# EAGLE board Micro_SD_Block-Panel-v10 (EAGLE 6.6.0), part 1 of 3
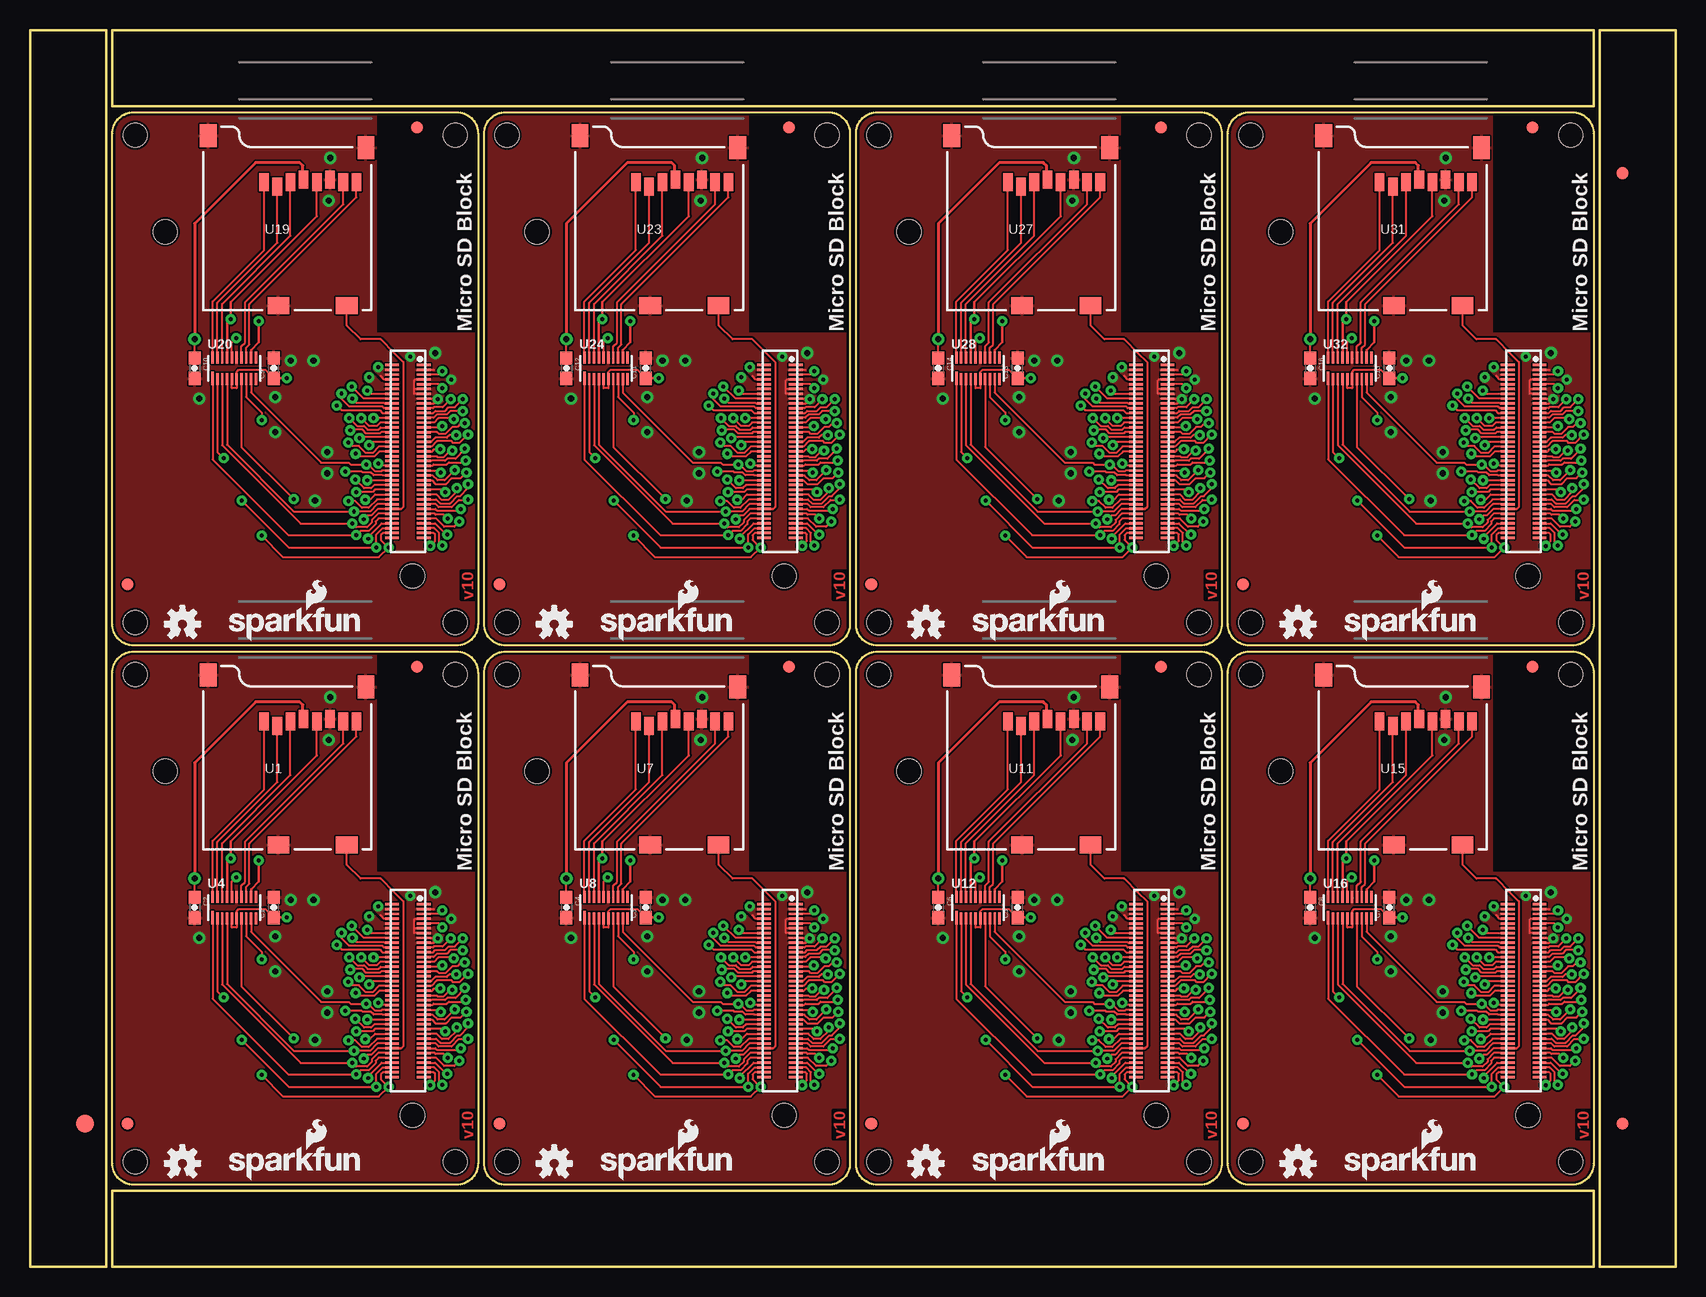
[diagram p0: board, top side]
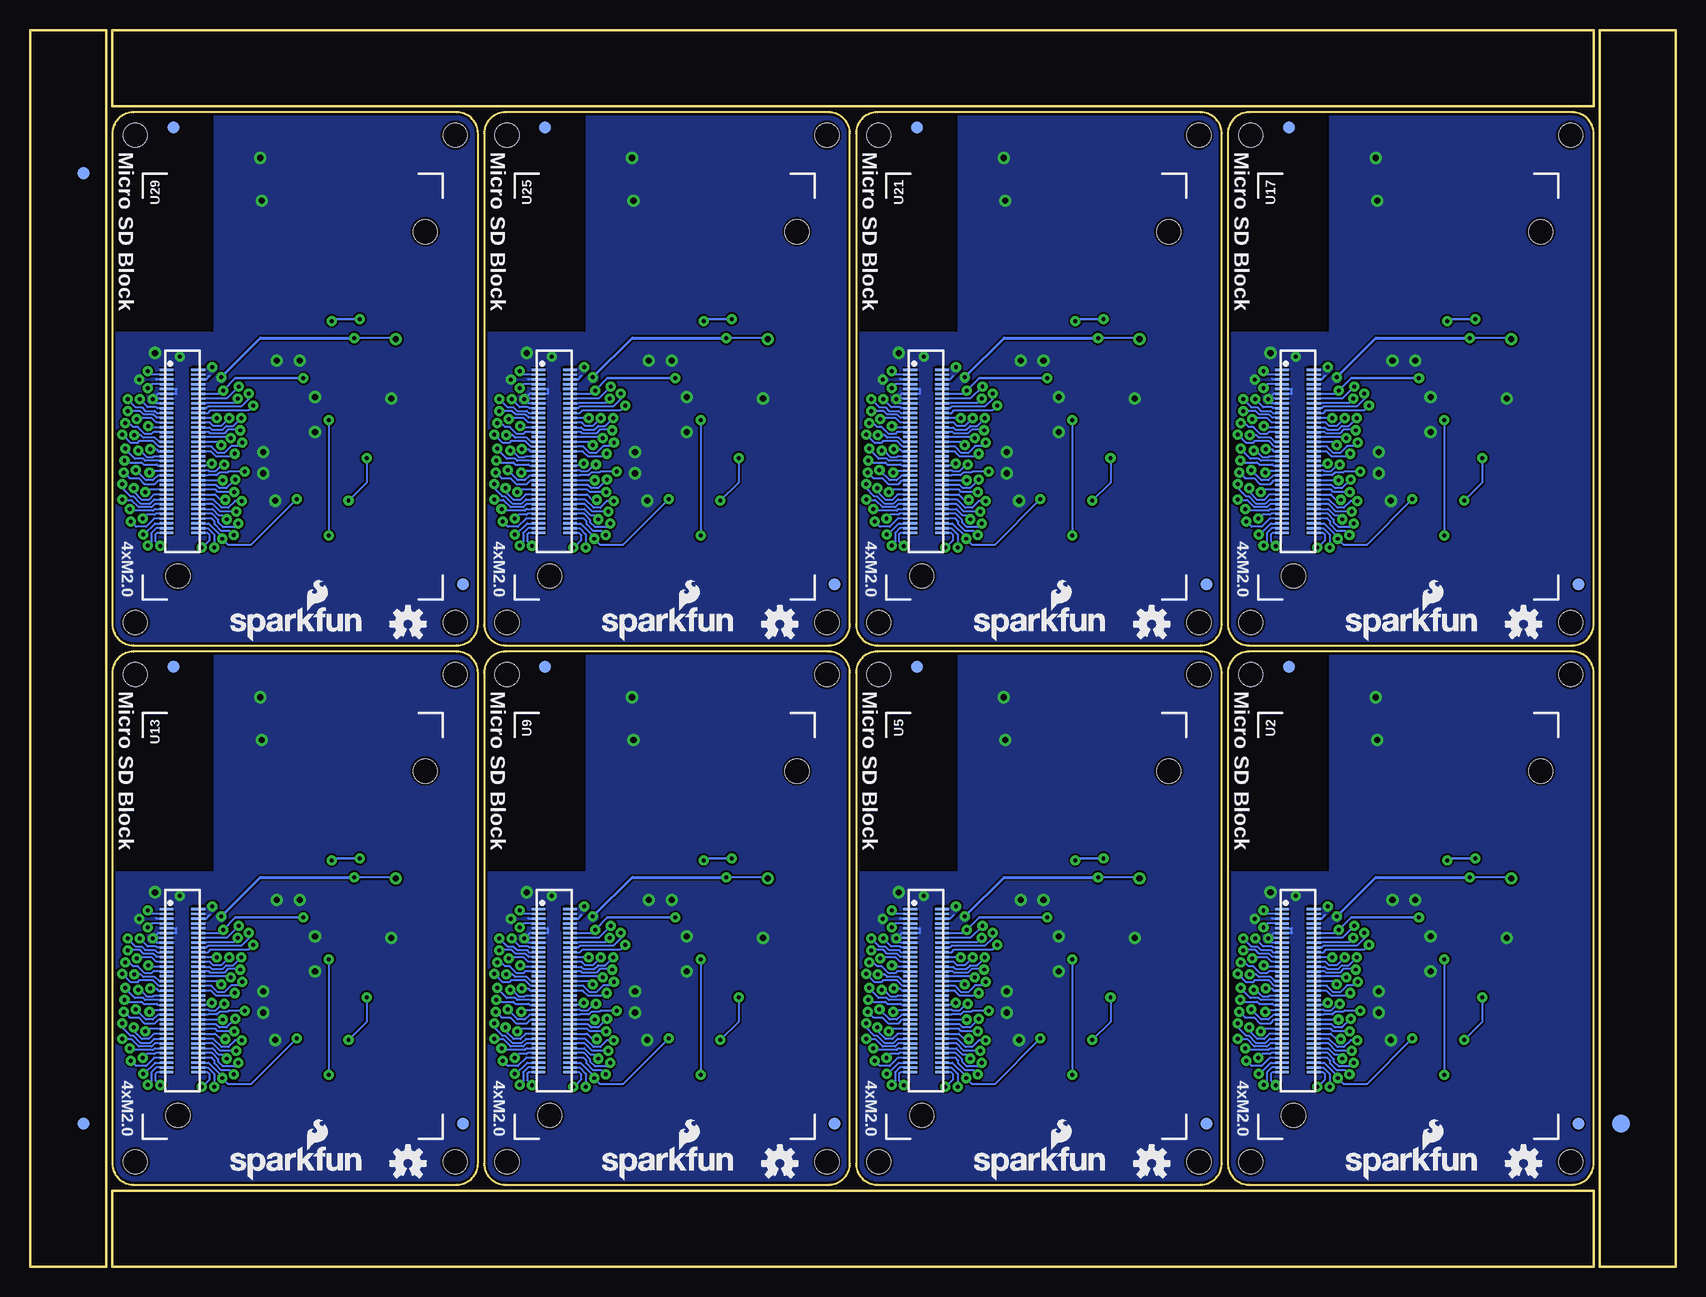
[diagram p1: board, bottom side, seen from below]

Size 137.16 x 103.12 mm. Coordinates in mm from the lower left corner, seen from the top.
Outline: 6.35,79.25 6.35,0 0,0 0,29.72
Outline: 137.16,79.25 137.16,0 130.81,0 130.81,29.72
Outline: 130.81,23.88 130.81,103.12 137.16,103.12 137.16,73.41
Outline: 0,23.88 0,103.12 6.35,103.12 6.35,73.41
Outline: 37.34,49.53 37.34,8.64 arc-90 35.56,6.86 8.64,6.86 arc-90 6.86,8.64 6.86,49.53 arc-90 8.64,51.31 35.56,51.31 arc-90 37.34,49.53
Outline: 68.33,49.53 68.33,8.64 arc-90 66.55,6.86 39.62,6.86 arc-90 37.85,8.64 37.85,49.53 arc-90 39.62,51.31 66.55,51.31 arc-90 68.33,49.53
Outline: 99.31,49.53 99.31,8.64 arc-90 97.54,6.86 70.61,6.86 arc-90 68.83,8.64 68.83,49.53 arc-90 70.61,51.31 97.54,51.31 arc-90 99.31,49.53
Outline: 130.3,49.53 130.3,8.64 arc-90 128.52,6.86 101.6,6.86 arc-90 99.82,8.64 99.82,49.53 arc-90 101.6,51.31 128.52,51.31 arc-90 130.3,49.53
Outline: 37.34,94.49 37.34,53.59 arc-90 35.56,51.82 8.64,51.82 arc-90 6.86,53.59 6.86,94.49 arc-90 8.64,96.27 35.56,96.27 arc-90 37.34,94.49
Outline: 68.33,94.49 68.33,53.59 arc-90 66.55,51.82 39.62,51.82 arc-90 37.85,53.59 37.85,94.49 arc-90 39.62,96.27 66.55,96.27 arc-90 68.33,94.49
Outline: 99.31,94.49 99.31,53.59 arc-90 97.54,51.82 70.61,51.82 arc-90 68.83,53.59 68.83,94.49 arc-90 70.61,96.27 97.54,96.27 arc-90 99.31,94.49
Outline: 130.3,94.49 130.3,53.59 arc-90 128.52,51.82 101.6,51.82 arc-90 99.82,53.59 99.82,94.49 arc-90 101.6,96.27 128.52,96.27 arc-90 130.3,94.49
Outline: 6.86,0 130.3,0 130.3,6.35 6.86,6.35 6.86,0
Outline: 130.3,103.12 6.86,103.12 6.86,96.77 130.3,96.77 130.3,103.12
Copper layers (1*16): Top 0.035mm / dielectric 1.5mm / Bottom 0.035mm
Design rules "SparkFun-2-layer *": minimum track width 6mil, minimum drill 13mil, track to track 6mil, track to pad 6mil, pad to pad 6mil, via to via 6mil, smd to smd 6mil, copper to edge 8mil, drill to drill 8mil, minimum pad ring 12mil, minimum via ring 10mil, stop-mask expansion 4mil, vias tented up to drill 20mil, thermal gap 6mil
Holes 2 mm at 35.43,8.76 8.76,8.76 8.76,49.4 35.43,49.4 66.42,8.76 39.75,8.76 39.75,49.4 66.42,49.4 97.41,8.76 70.74,8.76 70.74,49.4 97.41,49.4 128.4,8.76 101.73,8.76 101.73,49.4 128.4,49.4 35.43,53.72 8.76,53.72 8.76,94.36 35.43,94.36 66.42,53.72 39.75,53.72 39.75,94.36 66.42,94.36 97.41,53.72 70.74,53.72 70.74,94.36 97.41,94.36 128.4,53.72 101.73,53.72 101.73,94.36 128.4,94.36
tRestrict: area 29,33 to 37.3,51.3; area 59.9,33 to 68.3,51.3; area 90.9,33 to 99.3,51.3; area 121.9,33 to 130.3,51.3; area 29,78 to 37.3,96.3; area 59.9,78 to 68.3,96.3; area 90.9,78 to 99.3,96.3; area 121.9,78 to 130.3,96.3
bRestrict: area 29,33 to 37.3,51.3; area 59.9,33 to 68.3,51.3; area 90.9,33 to 99.3,51.3; area 121.9,33 to 130.3,51.3; area 29,78 to 37.3,96.3; area 59.9,78 to 68.3,96.3; area 90.9,78 to 99.3,96.3; area 121.9,78 to 130.3,96.3; 8 lines

## Footprints (pad centres in the part's own frame; a part is rotated, then mirrored left to right if it is on the bottom)
0603-CAP = smd 1.1 x 1: 1 -0.85,0; 2 0.85,0
FIDUCIAL-1.5X3 = smd 1.5 x 1.5: 1 0,0
FIDUCIAL-1X2 = smd 1 x 1: 1 0,0
MICRO-SD-SOCKET-PP = smd 0.8 x 1.5: 1 -8.94,10.7; 2 -7.84,10.3; 3 -6.74,10.7; 4 -5.64,10.9; 5 -4.54,10.7; 6 -3.44,10.9; 7 -2.34,10.7; 8 -1.24,10.7 | smd 1.8 x 1.4: CD1 -2.05,0.4; CD2 -7.75,0.4 | smd 1.4 x 1.9: GND1 -13.6,14.55; GND3 -0.45,13.55
EDISON_DAUGHTER = smd 1.14 x 0.2: 1 1.98,19.17; 2 4.62,19.17; 3 1.98,18.77; 4 4.62,18.77; 5 1.98,18.37; 6 4.62,18.37; 7 1.98,17.97; 8 4.62,17.97; 9 1.98,17.57; 10 4.62,17.57; 11 1.98,17.17; 12 4.62,17.17; 13 1.98,16.77; 14 4.62,16.77; 15 1.98,16.37; 16 4.62,16.37; 17 1.98,15.97; 18 4.62,15.97; 19 1.98,15.57; 20 4.62,15.57; 21 1.98,15.17; 22 4.62,15.17; 23 1.98,14.77; 24 4.62,14.77; 25 1.98,14.37; 26 4.62,14.37; 27 1.98,13.97; 28 4.62,13.97; 29 1.98,13.57; 30 4.62,13.57; 31 1.98,13.17; 32 4.62,13.17; 33 1.98,12.77; 34 4.62,12.77; 35 1.98,12.37; 36 4.62,12.37; 37 1.98,11.97; 38 4.62,11.97; 39 1.98,11.57; 40 4.62,11.57; 41 1.98,11.17; 42 4.62,11.17; 43 1.98,10.77; 44 4.62,10.77; 45 1.98,10.37; 46 4.62,10.37; 47 1.98,9.97; 48 4.62,9.97; 49 1.98,9.57; 50 4.62,9.57; 51 1.98,9.17; 52 4.62,9.17; 53 1.98,8.77; 54 4.62,8.77; 55 1.98,8.37; 56 4.62,8.37; 57 1.98,7.97; 58 4.62,7.97; 59 1.98,7.57; 60 4.62,7.57; 61 1.98,7.17; 62 4.62,7.17; 63 1.98,6.77; 64 4.62,6.77; 65 1.98,6.37; 66 4.62,6.37; 67 1.98,5.97; 68 4.62,5.97; 69 1.98,5.57; 70 4.62,5.57 | hole 2: 23.53,30.67; 2.93,1.98
DF40C-70DP-0.4(51) = smd 0.2 x 1.14 bottom: 1 6.8,1.32; 2 6.8,-1.32; 3 6.4,1.32; 4 6.4,-1.32; 5 6,1.32; 6 6,-1.32; 7 5.6,1.32; 8 5.6,-1.32; 9 5.2,1.32; 10 5.2,-1.32; 11 4.8,1.32; 12 4.8,-1.32; 13 4.4,1.32; 14 4.4,-1.32; 15 4,1.32; 16 4,-1.32; 17 3.6,1.32; 18 3.6,-1.32; 19 3.2,1.32; 20 3.2,-1.32; 21 2.8,1.32; 22 2.8,-1.32; 23 2.4,1.32; 24 2.4,-1.32; 25 2,1.32; 26 2,-1.32; 27 1.6,1.32; 28 1.6,-1.32; 29 1.2,1.32; 30 1.2,-1.32; 31 0.8,1.32; 32 0.8,-1.32; 33 0.4,1.32; 34 0.4,-1.32; 35 0,1.32; 36 0,-1.32; 37 -0.4,1.32; 38 -0.4,-1.32; 39 -0.8,1.32; 40 -0.8,-1.32; 41 -1.2,1.32; 42 -1.2,-1.32; 43 -1.6,1.32; 44 -1.6,-1.32; 45 -2,1.32; 46 -2,-1.32; 47 -2.4,1.32; 48 -2.4,-1.32; 49 -2.8,1.32; 50 -2.8,-1.32; 51 -3.2,1.32; 52 -3.2,-1.32; 53 -3.6,1.32; 54 -3.6,-1.32; 55 -4,1.32; 56 -4,-1.32; 57 -4.4,1.32; 58 -4.4,-1.32; 59 -4.8,1.32; 60 -4.8,-1.32; 61 -5.2,1.32; 62 -5.2,-1.32; 63 -5.6,1.32; 64 -5.6,-1.32; 65 -6,1.32; 66 -6,-1.32; 67 -6.4,1.32; 68 -6.4,-1.32; 69 -6.8,1.32; 70 -6.8,-1.32; NC1 7.2,1.32; NC2 7.2,-1.32; NC3 -7.2,-1.32; NC4 -7.2,1.32
UFDFN-20 = smd 0.2 x 1.1: P$1 -1.8,-0.85 | smd 0.2 x 1: P$2 -1.4,-0.9; P$3 -1,-0.9; P$4 -0.6,-0.9; P$5 -0.2,-0.9; P$6 0.2,-0.9; P$7 0.6,-0.9; P$8 1,-0.9; P$9 1.4,-0.9; P$10 1.8,-0.9; P$11 1.8,0.9; P$12 1.4,0.9; P$13 1,0.9; P$14 0.6,0.9; P$15 0.2,0.9; P$16 -0.2,0.9; P$17 -0.6,0.9; P$18 -1,0.9; P$19 -1.4,0.9; P$20 -1.8,0.9

## Placement (x,y rotation side)
C1  0.1uF  [0603-CAP]  20.32,29.97 90 top
C2  0.1uF  [0603-CAP]  13.72,29.97 270 top
C3  0.1uF  [0603-CAP]  51.31,29.97 90 top
C4  0.1uF  [0603-CAP]  44.7,29.97 270 top
C5  0.1uF  [0603-CAP]  82.3,29.97 90 top
C6  0.1uF  [0603-CAP]  75.69,29.97 270 top
C7  0.1uF  [0603-CAP]  113.28,29.97 90 top
C8  0.1uF  [0603-CAP]  106.68,29.97 270 top
C9  0.1uF  [0603-CAP]  20.32,74.93 90 top
C10  0.1uF  [0603-CAP]  13.72,74.93 270 top
C11  0.1uF  [0603-CAP]  51.31,74.93 90 top
C12  0.1uF  [0603-CAP]  44.7,74.93 270 top
C13  0.1uF  [0603-CAP]  82.3,74.93 90 top
C14  0.1uF  [0603-CAP]  75.69,74.93 270 top
C15  0.1uF  [0603-CAP]  113.28,74.93 90 top
C16  0.1uF  [0603-CAP]  106.68,74.93 270 top
E$1  [FIDUCIAL-1.5X3]  4.57,11.94 0 top
E$2  [FIDUCIAL-1.5X3]  4.57,11.94 0 bottom
E$3  [FIDUCIAL-1X2]  132.72,91.19 180 bottom
E$4  [FIDUCIAL-1X2]  132.72,11.94 0 top
E$5  [FIDUCIAL-1X2]  132.72,91.19 180 top
E$6  [FIDUCIAL-1X2]  132.72,11.94 0 bottom
FID1  FIDUCIAL1X2  [FIDUCIAL-1X2]  8.13,11.94 0 top
FID2  FIDUCIAL1X2  [FIDUCIAL-1X2]  32.26,50.04 0 top
FID3  FIDUCIAL1X2  [FIDUCIAL-1X2]  8.13,11.94 0 bottom
FID4  FIDUCIAL1X2  [FIDUCIAL-1X2]  32.26,50.04 0 bottom
FID5  FIDUCIAL1X2  [FIDUCIAL-1X2]  39.12,11.94 0 top
FID6  FIDUCIAL1X2  [FIDUCIAL-1X2]  63.25,50.04 0 top
FID7  FIDUCIAL1X2  [FIDUCIAL-1X2]  39.12,11.94 0 bottom
FID8  FIDUCIAL1X2  [FIDUCIAL-1X2]  63.25,50.04 0 bottom
FID9  FIDUCIAL1X2  [FIDUCIAL-1X2]  70.1,11.94 0 top
FID10  FIDUCIAL1X2  [FIDUCIAL-1X2]  94.23,50.04 0 top
FID11  FIDUCIAL1X2  [FIDUCIAL-1X2]  70.1,11.94 0 bottom
FID12  FIDUCIAL1X2  [FIDUCIAL-1X2]  94.23,50.04 0 bottom
FID13  FIDUCIAL1X2  [FIDUCIAL-1X2]  101.09,11.94 0 top
FID14  FIDUCIAL1X2  [FIDUCIAL-1X2]  125.22,50.04 0 top
FID15  FIDUCIAL1X2  [FIDUCIAL-1X2]  101.09,11.94 0 bottom
FID16  FIDUCIAL1X2  [FIDUCIAL-1X2]  125.22,50.04 0 bottom
FID17  FIDUCIAL1X2  [FIDUCIAL-1X2]  8.13,56.9 0 top
FID18  FIDUCIAL1X2  [FIDUCIAL-1X2]  32.26,95 0 top
FID19  FIDUCIAL1X2  [FIDUCIAL-1X2]  8.13,56.9 0 bottom
FID20  FIDUCIAL1X2  [FIDUCIAL-1X2]  32.26,95 0 bottom
FID21  FIDUCIAL1X2  [FIDUCIAL-1X2]  39.12,56.9 0 top
FID22  FIDUCIAL1X2  [FIDUCIAL-1X2]  63.25,95 0 top
FID23  FIDUCIAL1X2  [FIDUCIAL-1X2]  39.12,56.9 0 bottom
FID24  FIDUCIAL1X2  [FIDUCIAL-1X2]  63.25,95 0 bottom
FID25  FIDUCIAL1X2  [FIDUCIAL-1X2]  70.1,56.9 0 top
FID26  FIDUCIAL1X2  [FIDUCIAL-1X2]  94.23,95 0 top
FID27  FIDUCIAL1X2  [FIDUCIAL-1X2]  70.1,56.9 0 bottom
FID28  FIDUCIAL1X2  [FIDUCIAL-1X2]  94.23,95 0 bottom
FID29  FIDUCIAL1X2  [FIDUCIAL-1X2]  101.09,56.9 0 top
FID30  FIDUCIAL1X2  [FIDUCIAL-1X2]  125.22,95 0 top
FID31  FIDUCIAL1X2  [FIDUCIAL-1X2]  101.09,56.9 0 bottom
FID32  FIDUCIAL1X2  [FIDUCIAL-1X2]  125.22,95 0 bottom
LOGO1  OSHW-LOGOS  [OSHW-LOGO-S]  12.7,8.64 0 top
LOGO2  OSHW-LOGOS  [OSHW-LOGO-S]  12.7,8.64 0 bottom
LOGO3  SFE_LOGO_NAME_FLAME.1_INCH  [SFE_LOGO_NAME_FLAME_.1]  27.94,7.11 0 bottom
LOGO4  SFE_LOGO_NAME_FLAME.1_INCH  [SFE_LOGO_NAME_FLAME_.1]  16.15,7.11 0 top
LOGO5  OSHW-LOGOS  [OSHW-LOGO-S]  43.69,8.64 0 bottom
LOGO6  SFE_LOGO_NAME_FLAME.1_INCH  [SFE_LOGO_NAME_FLAME_.1]  58.93,7.11 0 bottom
LOGO7  OSHW-LOGOS  [OSHW-LOGO-S]  43.69,8.64 0 top
LOGO8  SFE_LOGO_NAME_FLAME.1_INCH  [SFE_LOGO_NAME_FLAME_.1]  47.14,7.11 0 top
LOGO9  OSHW-LOGOS  [OSHW-LOGO-S]  74.68,8.64 0 bottom
LOGO10  SFE_LOGO_NAME_FLAME.1_INCH  [SFE_LOGO_NAME_FLAME_.1]  89.92,7.11 0 bottom
LOGO11  OSHW-LOGOS  [OSHW-LOGO-S]  74.68,8.64 0 top
LOGO12  SFE_LOGO_NAME_FLAME.1_INCH  [SFE_LOGO_NAME_FLAME_.1]  78.13,7.11 0 top
LOGO13  OSHW-LOGOS  [OSHW-LOGO-S]  105.66,8.64 0 bottom
LOGO14  SFE_LOGO_NAME_FLAME.1_INCH  [SFE_LOGO_NAME_FLAME_.1]  120.9,7.11 0 bottom
LOGO15  OSHW-LOGOS  [OSHW-LOGO-S]  105.66,8.64 0 top
LOGO16  SFE_LOGO_NAME_FLAME.1_INCH  [SFE_LOGO_NAME_FLAME_.1]  109.12,7.11 0 top
LOGO17  OSHW-LOGOS  [OSHW-LOGO-S]  12.7,53.59 0 bottom
LOGO18  SFE_LOGO_NAME_FLAME.1_INCH  [SFE_LOGO_NAME_FLAME_.1]  27.94,52.07 0 bottom
LOGO19  OSHW-LOGOS  [OSHW-LOGO-S]  12.7,53.59 0 top
LOGO20  SFE_LOGO_NAME_FLAME.1_INCH  [SFE_LOGO_NAME_FLAME_.1]  16.15,52.07 0 top
LOGO21  OSHW-LOGOS  [OSHW-LOGO-S]  43.69,53.59 0 bottom
LOGO22  SFE_LOGO_NAME_FLAME.1_INCH  [SFE_LOGO_NAME_FLAME_.1]  58.93,52.07 0 bottom
LOGO23  OSHW-LOGOS  [OSHW-LOGO-S]  43.69,53.59 0 top
LOGO24  SFE_LOGO_NAME_FLAME.1_INCH  [SFE_LOGO_NAME_FLAME_.1]  47.14,52.07 0 top
LOGO25  OSHW-LOGOS  [OSHW-LOGO-S]  74.68,53.59 0 bottom
LOGO26  SFE_LOGO_NAME_FLAME.1_INCH  [SFE_LOGO_NAME_FLAME_.1]  89.92,52.07 0 bottom
LOGO27  OSHW-LOGOS  [OSHW-LOGO-S]  74.68,53.59 0 top
LOGO28  SFE_LOGO_NAME_FLAME.1_INCH  [SFE_LOGO_NAME_FLAME_.1]  78.13,52.07 0 top
LOGO29  OSHW-LOGOS  [OSHW-LOGO-S]  105.66,53.59 0 bottom
LOGO30  SFE_LOGO_NAME_FLAME.1_INCH  [SFE_LOGO_NAME_FLAME_.1]  120.9,52.07 0 bottom
LOGO31  OSHW-LOGOS  [OSHW-LOGO-S]  105.66,53.59 0 top
LOGO32  SFE_LOGO_NAME_FLAME.1_INCH  [SFE_LOGO_NAME_FLAME_.1]  109.12,52.07 0 top
U1  USD-SOCKETNEW  [MICRO-SD-SOCKET-PP]  28.45,34.8 0 top
U2  EDISON_CONNECTOR_FULLMOUNTING_HOLES  [EDISON_DAUGHTER]  34.8,10.67 0 bottom
U3  EDISON_CONNECTOR_FULLHEADER  [DF40C-70DP-0.4(51)]  31.5,23.04 90 bottom
U4  TXB0108  [UFDFN-20]  17.02,29.97 0 top
U5  EDISON_CONNECTOR_FULLMOUNTING_HOLES  [EDISON_DAUGHTER]  65.79,10.67 0 bottom
U6  EDISON_CONNECTOR_FULLHEADER  [DF40C-70DP-0.4(51)]  62.49,23.04 90 bottom
U7  USD-SOCKETNEW  [MICRO-SD-SOCKET-PP]  59.44,34.8 0 top
U8  TXB0108  [UFDFN-20]  48.01,29.97 0 top
U9  EDISON_CONNECTOR_FULLMOUNTING_HOLES  [EDISON_DAUGHTER]  96.77,10.67 0 bottom
U10  EDISON_CONNECTOR_FULLHEADER  [DF40C-70DP-0.4(51)]  93.47,23.04 90 bottom
U11  USD-SOCKETNEW  [MICRO-SD-SOCKET-PP]  90.42,34.8 0 top
U12  TXB0108  [UFDFN-20]  78.99,29.97 0 top
U13  EDISON_CONNECTOR_FULLMOUNTING_HOLES  [EDISON_DAUGHTER]  127.76,10.67 0 bottom
U14  EDISON_CONNECTOR_FULLHEADER  [DF40C-70DP-0.4(51)]  124.46,23.04 90 bottom
U15  USD-SOCKETNEW  [MICRO-SD-SOCKET-PP]  121.41,34.8 0 top
U16  TXB0108  [UFDFN-20]  109.98,29.97 0 top
U17  EDISON_CONNECTOR_FULLMOUNTING_HOLES  [EDISON_DAUGHTER]  34.8,55.63 0 bottom
U18  EDISON_CONNECTOR_FULLHEADER  [DF40C-70DP-0.4(51)]  31.5,68 90 bottom
U19  USD-SOCKETNEW  [MICRO-SD-SOCKET-PP]  28.45,79.76 0 top
U20  TXB0108  [UFDFN-20]  17.02,74.93 0 top
U21  EDISON_CONNECTOR_FULLMOUNTING_HOLES  [EDISON_DAUGHTER]  65.79,55.63 0 bottom
U22  EDISON_CONNECTOR_FULLHEADER  [DF40C-70DP-0.4(51)]  62.49,68 90 bottom
U23  USD-SOCKETNEW  [MICRO-SD-SOCKET-PP]  59.44,79.76 0 top
U24  TXB0108  [UFDFN-20]  48.01,74.93 0 top
U25  EDISON_CONNECTOR_FULLMOUNTING_HOLES  [EDISON_DAUGHTER]  96.77,55.63 0 bottom
U26  EDISON_CONNECTOR_FULLHEADER  [DF40C-70DP-0.4(51)]  93.47,68 90 bottom
U27  USD-SOCKETNEW  [MICRO-SD-SOCKET-PP]  90.42,79.76 0 top
U28  TXB0108  [UFDFN-20]  78.99,74.93 0 top
U29  EDISON_CONNECTOR_FULLMOUNTING_HOLES  [EDISON_DAUGHTER]  127.76,55.63 0 bottom
U30  EDISON_CONNECTOR_FULLHEADER  [DF40C-70DP-0.4(51)]  124.46,68 90 bottom
U31  USD-SOCKETNEW  [MICRO-SD-SOCKET-PP]  121.41,79.76 0 top
U32  TXB0108  [UFDFN-20]  109.98,74.93 0 top

## Library data of the parts
C1-C16 = SparkFun-Capacitors; PROD_ID: CAP-00810
E$1 E$2 = SparkFun-Retired
E$3-E$6 FID1-FID32 LOGO1-LOGO32 = SparkFun-Aesthetics
U1 U7 U11 U15 U19 U23 U27 U31 = SparkFun-Connectors
U2 U3 U5 U6 U9 U10 U13 U14 U17 U18 U21 U22 U25 U26 U29 U30 = Edison
U4 U8 U12 U16 U20 U24 U28 U32 = Testing

## Nets
1.8V: C1.1 U2.12 U3.12 U4.P$5 U4.P$6
1.8V1: C3.1 U5.12 U6.12 U8.P$5 U8.P$6
1.8V2: C5.1 U9.12 U10.12 U12.P$5 U12.P$6
1.8V3: C7.1 U13.12 U14.12 U16.P$5 U16.P$6
1.8V4: C9.1 U17.12 U18.12 U20.P$5 U20.P$6
1.8V5: C11.1 U21.12 U22.12 U24.P$5 U24.P$6
1.8V6: C13.1 U25.12 U26.12 U28.P$5 U28.P$6
1.8V7: C15.1 U29.12 U30.12 U32.P$5 U32.P$6
3.3V: C2.1 U1.4 U2.8 U2.10 U3.8 U3.10 U4.P$16
3.3V1: C4.1 U5.8 U5.10 U6.8 U6.10 U7.4 U8.P$16
3.3V2: C6.1 U9.8 U9.10 U10.8 U10.10 U11.4 U12.P$16
3.3V3: C8.1 U13.8 U13.10 U14.8 U14.10 U15.4 U16.P$16
3.3V4: C10.1 U17.8 U17.10 U18.8 U18.10 U19.4 U20.P$16
3.3V5: C12.1 U21.8 U21.10 U22.8 U22.10 U23.4 U24.P$16
3.3V6: C14.1 U25.8 U25.10 U26.8 U26.10 U27.4 U28.P$16
3.3V7: C16.1 U29.8 U29.10 U30.8 U30.10 U31.4 U32.P$16
DCIN: U2.14 U3.14
DCIN1: U5.14 U6.14
DCIN2: U9.14 U10.14
DCIN3: U13.14 U14.14
DCIN4: U17.14 U18.14
DCIN5: U21.14 U22.14
DCIN6: U25.14 U26.14
DCIN7: U29.14 U30.14
FAULT: U2.19 U3.19
FAULT1: U5.19 U6.19
FAULT2: U9.19 U10.19
FAULT3: U13.19 U14.19
FAULT4: U17.19 U18.19
FAULT5: U21.19 U22.19
FAULT6: U25.19 U26.19
FAULT7: U29.19 U30.19
FW_RCVR: U2.69 U3.69
FW_RCVR1: U5.69 U6.69
FW_RCVR2: U9.69 U10.69
FW_RCVR3: U13.69 U14.69
FW_RCVR4: U17.69 U18.69
FW_RCVR5: U21.69 U22.69
FW_RCVR6: U25.69 U26.69
FW_RCVR7: U29.69 U30.69
GND: C1.2 C2.2 U1.6 U1.CD2 U1.GND1 U1.GND3 U2.1 U2.5 U2.9 U2.11 U2.13 U2.15 U3.1 U3.5 U3.9 U3.11 U3.13 U3.15 U4.P$15
GND1: C3.2 C4.2 U5.1 U5.5 U5.9 U5.11 U5.13 U5.15 U6.1 U6.5 U6.9 U6.11 U6.13 U6.15 U7.6 U7.CD2 U7.GND1 U7.GND3 U8.P$15
GND2: C5.2 C6.2 U9.1 U9.5 U9.9 U9.11 U9.13 U9.15 U10.1 U10.5 U10.9 U10.11 U10.13 U10.15 U11.6 U11.CD2 U11.GND1 U11.GND3 U12.P$15
GND3: C7.2 C8.2 U13.1 U13.5 U13.9 U13.11 U13.13 U13.15 U14.1 U14.5 U14.9 U14.11 U14.13 U14.15 U15.6 U15.CD2 U15.GND1 U15.GND3 U16.P$15
GND4: C9.2 C10.2 U17.1 U17.5 U17.9 U17.11 U17.13 U17.15 U18.1 U18.5 U18.9 U18.11 U18.13 U18.15 U19.6 U19.CD2 U19.GND1 U19.GND3 U20.P$15
GND5: C11.2 C12.2 U21.1 U21.5 U21.9 U21.11 U21.13 U21.15 U22.1 U22.5 U22.9 U22.11 U22.13 U22.15 U23.6 U23.CD2 U23.GND1 U23.GND3 U24.P$15
GND6: C13.2 C14.2 U25.1 U25.5 U25.9 U25.11 U25.13 U25.15 U26.1 U26.5 U26.9 U26.11 U26.13 U26.15 U27.6 U27.CD2 U27.GND1 U27.GND3 U28.P$15
GND7: C15.2 C16.2 U29.1 U29.5 U29.9 U29.11 U29.13 U29.15 U30.1 U30.5 U30.9 U30.11 U30.13 U30.15 U31.6 U31.CD2 U31.GND1 U31.GND3 U32.P$15
GP1: U5.48 U6.48
GP2: U5.42 U6.42
GP3: U5.34 U6.34
GP4: U5.32 U6.32
GP5: U5.30 U6.30
GP6: U5.28 U6.28
GP7: U5.26 U6.26
GP8: U5.25 U6.25
GP9: U5.24 U6.24
GP10: U9.48 U10.48
GP11: U9.42 U10.42
GP12: U9.34 U10.34
GP12_PWM0: U2.35 U3.35
GP12_PWM1: U5.35 U6.35
GP12_PWM2: U9.35 U10.35
GP12_PWM3: U13.35 U14.35
GP12_PWM4: U17.35 U18.35
GP12_PWM5: U21.35 U22.35
GP12_PWM6: U25.35 U26.35
GP12_PWM7: U29.35 U30.35
GP13: U9.32 U10.32
GP13_PWM1: U2.33 U3.33
GP13_PWM2: U5.33 U6.33
GP13_PWM3: U9.33 U10.33
GP13_PWM4: U13.33 U14.33
GP13_PWM5: U17.33 U18.33
GP13_PWM6: U21.33 U22.33
GP13_PWM7: U25.33 U26.33
GP13_PWM8: U29.33 U30.33
GP14: U2.48 U3.48
GP15: U2.42 U3.42
GP16: U9.30 U10.30
GP17: U9.28 U10.28
GP18: U9.26 U10.26
GP19: U9.25 U10.25
GP19_I2C_1_SCL: U2.41 U3.41
GP19_I2C_1_SCL1: U5.41 U6.41
GP19_I2C_1_SCL2: U9.41 U10.41
GP19_I2C_1_SCL3: U13.41 U14.41
GP19_I2C_1_SCL4: U17.41 U18.41
GP19_I2C_1_SCL5: U21.41 U22.41
GP19_I2C_1_SCL6: U25.41 U26.41
GP19_I2C_1_SCL7: U29.41 U30.41
GP20: U9.24 U10.24
GP20_I2C_1_SDA: U2.43 U3.43
GP20_I2C_1_SDA1: U5.43 U6.43
GP20_I2C_1_SDA2: U9.43 U10.43
GP20_I2C_1_SDA3: U13.43 U14.43
GP20_I2C_1_SDA4: U17.43 U18.43
GP20_I2C_1_SDA5: U21.43 U22.43
GP20_I2C_1_SDA6: U25.43 U26.43
GP20_I2C_1_SDA7: U29.43 U30.43
GP21: U13.48 U14.48
GP22: U13.42 U14.42
GP23: U13.34 U14.34
GP24: U13.32 U14.32
GP25: U13.30 U14.30
GP26: U13.28 U14.28
GP27: U13.26 U14.26
GP27_I2C_6_SCL: U2.45 U3.45
GP27_I2C_6_SCL1: U5.45 U6.45
GP27_I2C_6_SCL2: U9.45 U10.45
GP27_I2C_6_SCL3: U13.45 U14.45
GP27_I2C_6_SCL4: U17.45 U18.45
GP27_I2C_6_SCL5: U21.45 U22.45
GP27_I2C_6_SCL6: U25.45 U26.45
GP27_I2C_6_SCL7: U29.45 U30.45
GP28: U13.25 U14.25
GP28_I2C_6_SDA: U2.47 U3.47
GP28_I2C_6_SDA1: U5.47 U6.47
GP28_I2C_6_SDA2: U9.47 U10.47
GP28_I2C_6_SDA3: U13.47 U14.47
GP28_I2C_6_SDA4: U17.47 U18.47
GP28_I2C_6_SDA5: U21.47 U22.47
GP28_I2C_6_SDA6: U25.47 U26.47
GP28_I2C_6_SDA7: U29.47 U30.47
GP29: U13.24 U14.24
GP30: U17.48 U18.48
GP31: U17.42 U18.42
GP32: U17.34 U18.34
GP33: U17.32 U18.32
GP34: U17.30 U18.30
GP35: U17.28 U18.28
GP36: U17.26 U18.26
GP37: U17.25 U18.25
GP38: U17.24 U18.24
GP39: U21.48 U22.48
GP40: U21.42 U22.42
GP40_I2S_2_CLK: U2.52 U3.52
GP40_I2S_2_CLK1: U5.52 U6.52
GP40_I2S_2_CLK2: U9.52 U10.52
GP40_I2S_2_CLK3: U13.52 U14.52
GP40_I2S_2_CLK4: U17.52 U18.52
GP40_I2S_2_CLK5: U21.52 U22.52
GP40_I2S_2_CLK6: U25.52 U26.52
GP40_I2S_2_CLK7: U29.52 U30.52
GP41: U21.34 U22.34
GP41_I2S_2_FS: U2.54 U3.54
GP41_I2S_2_FS1: U5.54 U6.54
GP41_I2S_2_FS2: U9.54 U10.54
GP41_I2S_2_FS3: U13.54 U14.54
GP41_I2S_2_FS4: U17.54 U18.54
GP41_I2S_2_FS5: U21.54 U22.54
GP41_I2S_2_FS6: U25.54 U26.54
GP41_I2S_2_FS7: U29.54 U30.54
GP42: U21.32 U22.32
GP42_I2S_2_RXD: U2.50 U3.50
GP42_I2S_2_RXD1: U5.50 U6.50
GP42_I2S_2_RXD2: U9.50 U10.50
GP42_I2S_2_RXD3: U13.50 U14.50
GP42_I2S_2_RXD4: U17.50 U18.50
GP42_I2S_2_RXD5: U21.50 U22.50
GP42_I2S_2_RXD6: U25.50 U26.50
GP42_I2S_2_RXD7: U29.50 U30.50
GP43: U21.30 U22.30
GP43_I2S_2_TXD: U2.56 U3.56
GP43_I2S_2_TXD1: U5.56 U6.56
GP43_I2S_2_TXD2: U9.56 U10.56
GP43_I2S_2_TXD3: U13.56 U14.56
GP43_I2S_2_TXD4: U17.56 U18.56
GP43_I2S_2_TXD5: U21.56 U22.56
GP43_I2S_2_TXD6: U25.56 U26.56
GP43_I2S_2_TXD7: U29.56 U30.56
GP44: U2.24 U3.24
GP45: U2.26 U3.26
GP46: U2.28 U3.28
GP47: U2.30 U3.30
GP48: U2.32 U3.32
GP49: U2.34 U3.34
GP50: U21.28 U22.28
GP51: U21.26 U22.26
GP52: U21.25 U22.25
GP53: U21.24 U22.24
GP54: U25.48 U26.48
GP55: U25.42 U26.42
GP56: U25.34 U26.34
GP57: U25.32 U26.32
GP58: U25.30 U26.30
GP59: U25.28 U26.28
GP60: U25.26 U26.26
GP61: U25.25 U26.25
GP62: U25.24 U26.24
GP63: U29.48 U30.48
GP64: U29.42 U30.42
GP65: U29.34 U30.34
GP66: U29.32 U30.32
GP67: U29.30 U30.30
GP68: U29.28 U30.28
GP69: U29.26 U30.26
GP70: U29.25 U30.25
GP71: U29.24 U30.24
GP77_SD_0_CD#: U1.CD1 U2.60 U3.60
GP77_SD_0_CD#1: U5.60 U6.60 U7.CD1
GP77_SD_0_CD#2: U9.60 U10.60 U11.CD1
GP77_SD_0_CD#3: U13.60 U14.60 U15.CD1
GP77_SD_0_CD#4: U17.60 U18.60 U19.CD1
GP77_SD_0_CD#5: U21.60 U22.60 U23.CD1
GP77_SD_0_CD#6: U25.60 U26.60 U27.CD1
GP77_SD_0_CD#7: U29.60 U30.60 U31.CD1
GP78_SD_0_CLK: U2.58 U3.58 U4.P$4
GP78_SD_0_CLK1: U5.58 U6.58 U8.P$4
GP78_SD_0_CLK2: U9.58 U10.58 U12.P$4
GP78_SD_0_CLK3: U13.58 U14.58 U16.P$4
GP78_SD_0_CLK4: U17.58 U18.58 U20.P$4
GP78_SD_0_CLK5: U21.58 U22.58 U24.P$4
GP78_SD_0_CLK6: U25.58 U26.58 U28.P$4
GP78_SD_0_CLK7: U29.58 U30.58 U32.P$4
GP79_SD_0_CMD: U2.62 U3.62 U4.P$3
GP79_SD_0_CMD1: U5.62 U6.62 U8.P$3
GP79_SD_0_CMD2: U9.62 U10.62 U12.P$3
GP79_SD_0_CMD3: U13.62 U14.62 U16.P$3
GP79_SD_0_CMD4: U17.62 U18.62 U20.P$3
GP79_SD_0_CMD5: U21.62 U22.62 U24.P$3
GP79_SD_0_CMD6: U25.62 U26.62 U28.P$3
GP79_SD_0_CMD7: U29.62 U30.62 U32.P$3
GP80_SD_0_DAT0: U2.66 U3.66 U4.P$7
GP80_SD_0_DAT1: U5.66 U6.66 U8.P$7
GP80_SD_0_DAT2: U9.66 U10.66 U12.P$7
GP80_SD_0_DAT3: U13.66 U14.66 U16.P$7
GP80_SD_0_DAT4: U17.66 U18.66 U20.P$7
GP80_SD_0_DAT5: U21.66 U22.66 U24.P$7
GP80_SD_0_DAT6: U25.66 U26.66 U28.P$7
GP80_SD_0_DAT7: U29.66 U30.66 U32.P$7
GP81_SD_0_DAT1: U2.70 U3.70 U4.P$8
GP81_SD_0_DAT2: U5.70 U6.70 U8.P$8
GP81_SD_0_DAT3: U9.70 U10.70 U12.P$8
GP81_SD_0_DAT4: U13.70 U14.70 U16.P$8
GP81_SD_0_DAT5: U17.70 U18.70 U20.P$8
GP81_SD_0_DAT6: U21.70 U22.70 U24.P$8
GP81_SD_0_DAT7: U25.70 U26.70 U28.P$8
GP81_SD_0_DAT8: U29.70 U30.70 U32.P$8
GP82_SD_0_DAT1: U5.64 U6.64 U8.P$1
GP82_SD_0_DAT2: U2.64 U3.64 U4.P$1
GP82_SD_0_DAT3: U9.64 U10.64 U12.P$1
GP82_SD_0_DAT4: U13.64 U14.64 U16.P$1
GP82_SD_0_DAT5: U17.64 U18.64 U20.P$1
GP82_SD_0_DAT6: U21.64 U22.64 U24.P$1
GP82_SD_0_DAT7: U25.64 U26.64 U28.P$1
GP82_SD_0_DAT8: U29.64 U30.64 U32.P$1
GP83_SD_0_DAT1: U5.68 U6.68 U8.P$2
GP83_SD_0_DAT2: U9.68 U10.68 U12.P$2
GP83_SD_0_DAT3: U2.68 U3.68 U4.P$2
GP83_SD_0_DAT4: U13.68 U14.68 U16.P$2
GP83_SD_0_DAT5: U17.68 U18.68 U20.P$2
GP83_SD_0_DAT6: U21.68 U22.68 U24.P$2
GP83_SD_0_DAT7: U25.68 U26.68 U28.P$2
GP83_SD_0_DAT8: U29.68 U30.68 U32.P$2
GP84_SD_CLK_FB: U2.44 U3.44 U4.P$9
GP84_SD_CLK_FB1: U5.44 U6.44 U8.P$9
GP84_SD_CLK_FB2: U9.44 U10.44 U12.P$9
GP84_SD_CLK_FB3: U13.44 U14.44 U16.P$9
GP84_SD_CLK_FB4: U17.44 U18.44 U20.P$9
GP84_SD_CLK_FB5: U21.44 U22.44 U24.P$9
GP84_SD_CLK_FB6: U25.44 U26.44 U28.P$9
GP84_SD_CLK_FB7: U29.44 U30.44 U32.P$9
GP109_SPI_2_CLK: U2.55 U3.55
GP109_SPI_2_CLK1: U5.55 U6.55
GP109_SPI_2_CLK2: U9.55 U10.55
GP109_SPI_2_CLK3: U13.55 U14.55
GP109_SPI_2_CLK4: U17.55 U18.55
GP109_SPI_2_CLK5: U21.55 U22.55
GP109_SPI_2_CLK6: U25.55 U26.55
GP109_SPI_2_CLK7: U29.55 U30.55
GP110_SPI_2_FS0: U2.53 U3.53
GP110_SPI_2_FS1: U5.53 U6.53
GP110_SPI_2_FS2: U9.53 U10.53
GP110_SPI_2_FS3: U13.53 U14.53
GP110_SPI_2_FS4: U17.53 U18.53
GP110_SPI_2_FS5: U21.53 U22.53
GP110_SPI_2_FS6: U25.53 U26.53
GP110_SPI_2_FS7: U29.53 U30.53
GP111_SPI_2_FS1: U2.51 U3.51
GP111_SPI_2_FS2: U5.51 U6.51
GP111_SPI_2_FS3: U9.51 U10.51
GP111_SPI_2_FS4: U13.51 U14.51
GP111_SPI_2_FS5: U17.51 U18.51
GP111_SPI_2_FS6: U21.51 U22.51
GP111_SPI_2_FS7: U25.51 U26.51
GP111_SPI_2_FS8: U29.51 U30.51
GP114_SPI_2_RXD: U2.59 U3.59
GP114_SPI_2_RXD1: U5.59 U6.59
GP114_SPI_2_RXD2: U9.59 U10.59
GP114_SPI_2_RXD3: U13.59 U14.59
GP114_SPI_2_RXD4: U17.59 U18.59
GP114_SPI_2_RXD5: U21.59 U22.59
GP114_SPI_2_RXD6: U25.59 U26.59
GP114_SPI_2_RXD7: U29.59 U30.59
GP115_SPI_2_TXD: U2.57 U3.57
GP115_SPI_2_TXD1: U5.57 U6.57
GP115_SPI_2_TXD2: U9.57 U10.57
GP115_SPI_2_TXD3: U13.57 U14.57
GP115_SPI_2_TXD4: U17.57 U18.57
GP115_SPI_2_TXD5: U21.57 U22.57
GP115_SPI_2_TXD6: U25.57 U26.57
GP115_SPI_2_TXD7: U29.57 U30.57
GP128_UART_1_CTS: U2.65 U3.65
GP128_UART_1_CTS1: U5.65 U6.65
GP128_UART_1_CTS2: U9.65 U10.65
GP128_UART_1_CTS3: U13.65 U14.65
GP128_UART_1_CTS4: U17.65 U18.65
GP128_UART_1_CTS5: U21.65 U22.65
GP128_UART_1_CTS6: U25.65 U26.65
GP128_UART_1_CTS7: U29.65 U30.65
GP129_UART_1_RTS: U2.63 U3.63
GP129_UART_1_RTS1: U5.63 U6.63
GP129_UART_1_RTS2: U9.63 U10.63
GP129_UART_1_RTS3: U13.63 U14.63
GP129_UART_1_RTS4: U17.63 U18.63
GP129_UART_1_RTS5: U21.63 U22.63
GP129_UART_1_RTS6: U25.63 U26.63
GP129_UART_1_RTS7: U29.63 U30.63
GP130_UART_1_RX: U2.61 U3.61
GP130_UART_1_RX1: U5.61 U6.61
GP130_UART_1_RX2: U9.61 U10.61
GP130_UART_1_RX3: U13.61 U14.61
GP130_UART_1_RX4: U17.61 U18.61
GP130_UART_1_RX5: U21.61 U22.61
GP130_UART_1_RX6: U25.61 U26.61
GP130_UART_1_RX7: U29.61 U30.61
GP131_UART_1_TX: U2.46 U3.46
GP131_UART_1_TX1: U5.46 U6.46
GP131_UART_1_TX2: U9.46 U10.46
GP131_UART_1_TX3: U13.46 U14.46
GP131_UART_1_TX4: U17.46 U18.46
GP131_UART_1_TX5: U21.46 U22.46
GP131_UART_1_TX6: U25.46 U26.46
GP131_UART_1_TX7: U29.46 U30.46
GP134_UART_2_RX: U2.22 U3.22
GP134_UART_2_RX1: U5.22 U6.22
GP134_UART_2_RX2: U9.22 U10.22
GP134_UART_2_RX3: U13.22 U14.22
GP134_UART_2_RX4: U17.22 U18.22
GP134_UART_2_RX5: U21.22 U22.22
GP134_UART_2_RX6: U25.22 U26.22
GP134_UART_2_RX7: U29.22 U30.22
GP135_UART_2_TX: U2.27 U3.27
GP135_UART_2_TX1: U5.27 U6.27
GP135_UART_2_TX2: U9.27 U10.27
GP135_UART_2_TX3: U13.27 U14.27
GP135_UART_2_TX4: U17.27 U18.27
GP135_UART_2_TX5: U21.27 U22.27
GP135_UART_2_TX6: U25.27 U26.27
GP135_UART_2_TX7: U29.27 U30.27
GP165: U2.25 U3.25
GP182_PWM1: U5.37 U6.37
GP182_PWM2: U2.37 U3.37
GP182_PWM3: U9.37 U10.37
GP182_PWM4: U13.37 U14.37
GP182_PWM5: U17.37 U18.37
GP182_PWM6: U21.37 U22.37
GP182_PWM7: U25.37 U26.37
GP182_PWM8: U29.37 U30.37
GP183_PWM1: U5.39 U6.39
GP183_PWM2: U9.39 U10.39
GP183_PWM3: U2.39 U3.39
GP183_PWM4: U13.39 U14.39
GP183_PWM5: U17.39 U18.39
GP183_PWM6: U21.39 U22.39
GP183_PWM7: U25.39 U26.39
GP183_PWM8: U29.39 U30.39
MSIC_SLP_CLK: U2.7 U3.7
MSIC_SLP_CLK1: U5.7 U6.7
MSIC_SLP_CLK2: U9.7 U10.7
MSIC_SLP_CLK3: U13.7 U14.7
MSIC_SLP_CLK4: U17.7 U18.7
MSIC_SLP_CLK5: U21.7 U22.7
MSIC_SLP_CLK6: U25.7 U26.7
MSIC_SLP_CLK7: U29.7 U30.7
N$1: U1.1 U4.P$20
N$2: U1.2 U4.P$19
N$3: U1.3 U4.P$18
N$4: U7.1 U8.P$20
N$5: U1.7 U4.P$14
N$6: U1.8 U4.P$13
N$7: U7.2 U8.P$19
N$8: U7.3 U8.P$18
N$9: U7.7 U8.P$14
N$10: U7.8 U8.P$13
N$11: U11.1 U12.P$20
N$12: U11.2 U12.P$19
N$13: U11.3 U12.P$18
N$14: U11.7 U12.P$14
N$15: U11.8 U12.P$13
N$16: U15.1 U16.P$20
N$17: U15.2 U16.P$19
N$18: U15.3 U16.P$18
N$19: U15.7 U16.P$14
N$20: U15.8 U16.P$13
N$21: U19.1 U20.P$20
N$22: U19.2 U20.P$19
N$23: U19.3 U20.P$18
N$24: U19.7 U20.P$14
N$25: U19.8 U20.P$13
N$26: U23.1 U24.P$20
N$27: U23.2 U24.P$19
N$28: U23.3 U24.P$18
N$29: U23.7 U24.P$14
N$30: U23.8 U24.P$13
N$31: U27.1 U28.P$20
N$32: U27.2 U28.P$19
N$33: U27.3 U28.P$18
N$34: U27.7 U28.P$14
N$35: U27.8 U28.P$13
N$36: U31.1 U32.P$20
N$37: U31.2 U32.P$19
N$38: U31.3 U32.P$18
N$39: U31.7 U32.P$14
N$40: U31.8 U32.P$13
OSC_CLK_OUT: U2.67 U3.67
OSC_CLK_OUT1: U5.67 U6.67
OSC_CLK_OUT2: U9.67 U10.67
OSC_CLK_OUT3: U13.67 U14.67
OSC_CLK_OUT4: U17.67 U18.67
OSC_CLK_OUT5: U21.67 U22.67
OSC_CLK_OUT6: U25.67 U26.67
OSC_CLK_OUT7: U29.67 U30.67
PSW: U2.21 U3.21
PSW1: U5.21 U6.21
PSW2: U9.21 U10.21
PSW3: U13.21 U14.21
PSW4: U17.21 U18.21
PSW5: U21.21 U22.21
PSW6: U25.21 U26.21
PSW7: U29.21 U30.21
PWRBTN#: U2.17 U3.17
PWRBTN#1: U5.17 U6.17
PWRBTN#2: U9.17 U10.17
PWRBTN#3: U13.17 U14.17
PWRBTN#4: U17.17 U18.17
PWRBTN#5: U21.17 U22.17
PWRBTN#6: U25.17 U26.17
PWRBTN#7: U29.17 U30.17
RCVR_MODE: U2.31 U3.31
RCVR_MODE1: U5.31 U6.31
RCVR_MODE2: U9.31 U10.31
RCVR_MODE3: U13.31 U14.31
RCVR_MODE4: U17.31 U18.31
RCVR_MODE5: U21.31 U22.31
RCVR_MODE6: U25.31 U26.31
RCVR_MODE7: U29.31 U30.31
RESET_OUT#: U2.36 U3.36
RESET_OUT#1: U5.36 U6.36
RESET_OUT#2: U9.36 U10.36
RESET_OUT#3: U13.36 U14.36
RESET_OUT#4: U17.36 U18.36
RESET_OUT#5: U21.36 U22.36
RESET_OUT#6: U25.36 U26.36
RESET_OUT#7: U29.36 U30.36
SCK: U1.5 U4.P$12 U4.P$17
SCK1: U7.5 U8.P$12 U8.P$17
SCK2: U11.5 U12.P$12 U12.P$17
SCK3: U15.5 U16.P$12 U16.P$17
SCK4: U19.5 U20.P$12 U20.P$17
SCK5: U23.5 U24.P$12 U24.P$17
SCK6: U27.5 U28.P$12 U28.P$17
SCK7: U31.5 U32.P$12 U32.P$17
USB_DN: U2.18 U3.18
USB_DN1: U5.18 U6.18
USB_DN2: U9.18 U10.18
USB_DN3: U13.18 U14.18
USB_DN4: U17.18 U18.18
USB_DN5: U21.18 U22.18
USB_DN6: U25.18 U26.18
USB_DN7: U29.18 U30.18
USB_DP: U2.16 U3.16
USB_DP1: U5.16 U6.16
USB_DP2: U9.16 U10.16
USB_DP3: U13.16 U14.16
USB_DP4: U17.16 U18.16
USB_DP5: U21.16 U22.16
USB_DP6: U25.16 U26.16
USB_DP7: U29.16 U30.16
USB_ID: U2.3 U3.3
USB_ID1: U5.3 U6.3
USB_ID2: U9.3 U10.3
USB_ID3: U13.3 U14.3
USB_ID4: U17.3 U18.3
USB_ID5: U21.3 U22.3
USB_ID6: U25.3 U26.3
USB_ID7: U29.3 U30.3
USB_VBUS: U2.20 U3.20
USB_VBUS1: U5.20 U6.20
USB_VBUS2: U9.20 U10.20
USB_VBUS3: U13.20 U14.20
USB_VBUS4: U17.20 U18.20
USB_VBUS5: U21.20 U22.20
USB_VBUS6: U25.20 U26.20
USB_VBUS7: U29.20 U30.20
V_BAT_BKUP: U2.23 U3.23
V_BAT_BKUP1: U5.23 U6.23
V_BAT_BKUP2: U9.23 U10.23
V_BAT_BKUP3: U13.23 U14.23
V_BAT_BKUP4: U17.23 U18.23
V_BAT_BKUP5: U21.23 U22.23
V_BAT_BKUP6: U25.23 U26.23
V_BAT_BKUP7: U29.23 U30.23
VSYS: U2.2 U2.4 U2.6 U3.2 U3.4 U3.6
VSYS1: U5.2 U5.4 U5.6 U6.2 U6.4 U6.6
VSYS2: U9.2 U9.4 U9.6 U10.2 U10.4 U10.6
VSYS3: U13.2 U13.4 U13.6 U14.2 U14.4 U14.6
VSYS4: U17.2 U17.4 U17.6 U18.2 U18.4 U18.6
VSYS5: U21.2 U21.4 U21.6 U22.2 U22.4 U22.6
VSYS6: U25.2 U25.4 U25.6 U26.2 U26.4 U26.6
VSYS7: U29.2 U29.4 U29.6 U30.2 U30.4 U30.6

## Tracks (layer width: path | path; a pad name or v marks a point on that pad's centre or on a via)
1.8V  (via drill 0.33)
  Top 0.152: U4.P$6 17.22,29.66 17.4,29.84 19.6,29.84 C1.1 arc90 20.33,29.13 | v28.09,28.12 28.37,27.84 U3.12
  Top 0.178: U4.P$6 17.22,28.3 16.82,28.3 U4.P$5
  Top 0.203: 20.33,29.13 v21.41,29.13
  Bottom 0.152: U3.12 28.37,27.84 v28.09,28.12
  Bottom 0.203: v21.41,29.13 27.08,29.13 v28.09,28.12
1.8V1  (via drill 0.33)
  Top 0.152: U8.P$6 48.21,29.66 48.39,29.84 50.59,29.84 C3.1 arc90 51.32,29.13 | v59.08,28.12 59.36,27.84 U6.12
  Top 0.178: U8.P$6 48.21,28.3 47.81,28.3 U8.P$5
  Top 0.203: 51.32,29.13 v52.4,29.13
  Bottom 0.152: U6.12 59.36,27.84 v59.08,28.12
  Bottom 0.203: v52.4,29.13 58.06,29.13 v59.08,28.12
1.8V2  (via drill 0.33)
  Top 0.152: U12.P$6 79.19,29.66 79.38,29.84 81.57,29.84 C5.1 arc90 82.31,29.13 | v90.07,28.12 90.35,27.84 U10.12
  Top 0.178: U12.P$6 79.19,28.3 78.79,28.3 U12.P$5
  Top 0.203: 82.31,29.13 v83.39,29.13
  Bottom 0.152: U10.12 90.35,27.84 v90.07,28.12
  Bottom 0.203: v83.39,29.13 89.05,29.13 v90.07,28.12
1.8V3  (via drill 0.33)
  Top 0.152: U16.P$6 110.18,29.66 110.36,29.84 112.56,29.84 C7.1 arc90 113.3,29.13 | v121.06,28.12 121.34,27.84 U14.12
  Top 0.178: U16.P$6 110.18,28.3 109.78,28.3 U16.P$5
  Top 0.203: 113.3,29.13 v114.38,29.13
  Bottom 0.152: U14.12 121.34,27.84 v121.06,28.12
  Bottom 0.203: v114.38,29.13 120.04,29.13 v121.06,28.12
1.8V4  (via drill 0.33)
  Top 0.152: U20.P$6 17.22,74.62 17.4,74.8 19.6,74.8 C9.1 arc90 20.33,74.09 | v28.09,73.08 28.37,72.8 U18.12
  Top 0.178: U20.P$6 17.22,73.25 16.82,73.25 U20.P$5
  Top 0.203: 20.33,74.09 v21.41,74.09
  Bottom 0.152: U18.12 28.37,72.8 v28.09,73.08
  Bottom 0.203: v21.41,74.09 27.08,74.09 v28.09,73.08
1.8V5  (via drill 0.33)
  Top 0.152: U24.P$6 48.21,74.62 48.39,74.8 50.59,74.8 C11.1 arc90 51.32,74.09 | v59.08,73.08 59.36,72.8 U22.12
  Top 0.178: U24.P$6 48.21,73.25 47.81,73.25 U24.P$5
  Top 0.203: 51.32,74.09 v52.4,74.09
  Bottom 0.152: U22.12 59.36,72.8 v59.08,73.08
  Bottom 0.203: v52.4,74.09 58.06,74.09 v59.08,73.08
1.8V6  (via drill 0.33)
  Top 0.152: U28.P$6 79.19,74.62 79.38,74.8 81.57,74.8 C13.1 arc90 82.31,74.09 | v90.07,73.08 90.35,72.8 U26.12
  Top 0.178: U28.P$6 79.19,73.25 78.79,73.25 U28.P$5
  Top 0.203: 82.31,74.09 v83.39,74.09
  Bottom 0.152: U26.12 90.35,72.8 v90.07,73.08
  Bottom 0.203: v83.39,74.09 89.05,74.09 v90.07,73.08
1.8V7  (via drill 0.33)
  Top 0.152: U32.P$6 110.18,74.62 110.36,74.8 112.56,74.8 C15.1 arc90 113.3,74.09 | v121.06,73.08 121.34,72.8 U30.12
  Top 0.178: U32.P$6 110.18,73.25 109.78,73.25 U32.P$5
  Top 0.203: 113.3,74.09 v114.38,74.09
  Bottom 0.152: U30.12 121.34,72.8 v121.06,73.08
  Bottom 0.203: v114.38,74.09 120.04,74.09 v121.06,73.08
3.3V  (via drill 0.33, 0.51)
  Top 0.178: U4.P$16 16.82,32.13 v17.17,32.49 | C2.1 v13.72,32.38
  Top 0.254: U1.4 22.73,45.62 22.73,46.86 22.48,47.12 18.8,47.12 13.72,42.04 v13.72,32.38
  Bottom 0.178: v13.72,32.38 13.82,32.49 v17.17,32.49
  Bottom 0.254: v17.17,32.49 24.99,32.49 v28.27,29.21
  pour Top (isolate 0.051): 30.73,28.14 30.73,28.73 29.29,28.73 28.45,29.57 28.12,29.57 27.89,29.34 27.89,29.03 28.78,28.14
  pour Bottom (isolate 0.051): 30.73,28.14 30.73,28.73 29.29,28.73 28.45,29.57 28.12,29.57 27.89,29.34 27.89,29.03 28.78,28.14
3.3V1  (via drill 0.33, 0.51)
  Top 0.178: U8.P$16 47.81,32.13 v48.16,32.49 | C4.1 v44.7,32.38
  Top 0.254: U7.4 53.72,45.62 53.72,46.86 53.47,47.12 49.78,47.12 44.7,42.04 v44.7,32.38
  Bottom 0.178: v44.7,32.38 44.81,32.49 v48.16,32.49
  Bottom 0.254: v48.16,32.49 55.98,32.49 v59.26,29.21
  pour Top (isolate 0.051): 61.72,28.14 61.72,28.73 60.27,28.73 59.44,29.57 59.11,29.57 58.88,29.34 58.88,29.03 59.77,28.14
  pour Bottom (isolate 0.051): 61.72,28.14 61.72,28.73 60.27,28.73 59.44,29.57 59.11,29.57 58.88,29.34 58.88,29.03 59.77,28.14
3.3V2  (via drill 0.33, 0.51)
  Top 0.178: U12.P$16 78.79,32.13 v79.15,32.49 | C6.1 v75.69,32.38
  Top 0.254: U11.4 84.71,45.62 84.71,46.86 84.45,47.12 80.77,47.12 75.69,42.04 v75.69,32.38
  Bottom 0.178: v75.69,32.38 75.79,32.49 v79.15,32.49
  Bottom 0.254: v79.15,32.49 86.97,32.49 v90.25,29.21
  pour Top (isolate 0.051): 92.71,28.14 92.71,28.73 91.26,28.73 90.42,29.57 90.09,29.57 89.87,29.34 89.87,29.03 90.75,28.14
  pour Bottom (isolate 0.051): 92.71,28.14 92.71,28.73 91.26,28.73 90.42,29.57 90.09,29.57 89.87,29.34 89.87,29.03 90.75,28.14
3.3V3  (via drill 0.33, 0.51)
  Top 0.178: U16.P$16 109.78,32.13 v110.13,32.49 | C8.1 v106.68,32.38
  Top 0.254: U15.4 115.7,45.62 115.7,46.86 115.44,47.12 111.76,47.12 106.68,42.04 v106.68,32.38
  Bottom 0.178: v106.68,32.38 106.78,32.49 v110.13,32.49
  Bottom 0.254: v110.13,32.49 117.96,32.49 v121.23,29.21
  pour Top (isolate 0.051): 123.7,28.14 123.7,28.73 122.25,28.73 121.41,29.57 121.08,29.57 120.85,29.34 120.85,29.03 121.74,28.14
  pour Bottom (isolate 0.051): 123.7,28.14 123.7,28.73 122.25,28.73 121.41,29.57 121.08,29.57 120.85,29.34 120.85,29.03 121.74,28.14
3.3V4  (via drill 0.33, 0.51)
  Top 0.178: U20.P$16 16.82,77.09 v17.17,77.44 | C10.1 v13.72,77.34
  Top 0.254: U19.4 22.73,90.58 22.73,91.82 22.48,92.08 18.8,92.08 13.72,87 v13.72,77.34
  Bottom 0.178: v13.72,77.34 13.82,77.44 v17.17,77.44
  Bottom 0.254: v17.17,77.44 24.99,77.44 v28.27,74.17
  pour Top (isolate 0.051): 30.73,73.1 30.73,73.69 29.29,73.69 28.45,74.52 28.12,74.52 27.89,74.3 27.89,73.99 28.78,73.1
  pour Bottom (isolate 0.051): 30.73,73.1 30.73,73.69 29.29,73.69 28.45,74.52 28.12,74.52 27.89,74.3 27.89,73.99 28.78,73.1
3.3V5  (via drill 0.33, 0.51)
  Top 0.178: U24.P$16 47.81,77.09 v48.16,77.44 | C12.1 v44.7,77.34
  Top 0.254: U23.4 53.72,90.58 53.72,91.82 53.47,92.08 49.78,92.08 44.7,87 v44.7,77.34
  Bottom 0.178: v44.7,77.34 44.81,77.44 v48.16,77.44
  Bottom 0.254: v48.16,77.44 55.98,77.44 v59.26,74.17
  pour Top (isolate 0.051): 61.72,73.1 61.72,73.69 60.27,73.69 59.44,74.52 59.11,74.52 58.88,74.3 58.88,73.99 59.77,73.1
  pour Bottom (isolate 0.051): 61.72,73.1 61.72,73.69 60.27,73.69 59.44,74.52 59.11,74.52 58.88,74.3 58.88,73.99 59.77,73.1
3.3V6  (via drill 0.33, 0.51)
  Top 0.178: U28.P$16 78.79,77.09 v79.15,77.44 | C14.1 v75.69,77.34
  Top 0.254: U27.4 84.71,90.58 84.71,91.82 84.45,92.08 80.77,92.08 75.69,87 v75.69,77.34
  Bottom 0.178: v75.69,77.34 75.79,77.44 v79.15,77.44
  Bottom 0.254: v79.15,77.44 86.97,77.44 v90.25,74.17
  pour Top (isolate 0.051): 92.71,73.1 92.71,73.69 91.26,73.69 90.42,74.52 90.09,74.52 89.87,74.3 89.87,73.99 90.75,73.1
  pour Bottom (isolate 0.051): 92.71,73.1 92.71,73.69 91.26,73.69 90.42,74.52 90.09,74.52 89.87,74.3 89.87,73.99 90.75,73.1
3.3V7  (via drill 0.33, 0.51)
  Top 0.178: U32.P$16 109.78,77.09 v110.13,77.44 | C16.1 v106.68,77.34
  Top 0.254: U31.4 115.7,90.58 115.7,91.82 115.44,92.08 111.76,92.08 106.68,87 v106.68,77.34
  Bottom 0.178: v106.68,77.34 106.78,77.44 v110.13,77.44
  Bottom 0.254: v110.13,77.44 117.96,77.44 v121.23,74.17
  pour Top (isolate 0.051): 123.7,73.1 123.7,73.69 122.25,73.69 121.41,74.52 121.08,74.52 120.85,74.3 120.85,73.99 121.74,73.1
  pour Bottom (isolate 0.051): 123.7,73.1 123.7,73.69 122.25,73.69 121.41,74.52 121.08,74.52 120.85,74.3 120.85,73.99 121.74,73.1
DCIN  (via drill 0.33)
  Top 0.152: U3.14 27.81,27.44 v26.8,28.45
  Bottom 0.152: v26.8,28.45 27.81,27.44 U3.14
DCIN1  (via drill 0.33)
  Top 0.152: U6.14 58.8,27.44 v57.78,28.45
  Bottom 0.152: v57.78,28.45 58.8,27.44 U6.14
DCIN2  (via drill 0.33)
  Top 0.152: U10.14 89.78,27.44 v88.77,28.45
  Bottom 0.152: v88.77,28.45 89.78,27.44 U10.14
DCIN3  (via drill 0.33)
  Top 0.152: U14.14 120.77,27.44 v119.76,28.45
  Bottom 0.152: v119.76,28.45 120.77,27.44 U14.14
DCIN4  (via drill 0.33)
  Top 0.152: U18.14 27.81,72.4 v26.8,73.41
  Bottom 0.152: v26.8,73.41 27.81,72.4 U18.14
DCIN5  (via drill 0.33)
  Top 0.152: U22.14 58.8,72.4 v57.78,73.41
  Bottom 0.152: v57.78,73.41 58.8,72.4 U22.14
DCIN6  (via drill 0.33)
  Top 0.152: U26.14 89.78,72.4 v88.77,73.41
  Bottom 0.152: v88.77,73.41 89.78,72.4 U26.14
DCIN7  (via drill 0.33)
  Top 0.152: U30.14 120.77,72.4 v119.76,73.41
  Bottom 0.152: v119.76,73.41 120.77,72.4 U30.14
FAULT  (via drill 0.33)
  Top 0.152: U3.19 33.6,26.24 33.78,26.42 34.59,26.42 34.9,26.72 35.41,26.72 v36.07,27.38
  Bottom 0.152: v36.07,27.38 35.41,26.72 34.9,26.72 34.59,26.42 33.78,26.42 33.6,26.24 U3.19
FAULT1  (via drill 0.33)
  Top 0.152: U6.19 64.59,26.24 64.77,26.42 65.58,26.42 65.89,26.72 66.4,26.72 v67.06,27.38
  Bottom 0.152: v67.06,27.38 66.4,26.72 65.89,26.72 65.58,26.42 64.77,26.42 64.59,26.24 U6.19
FAULT2  (via drill 0.33)
  Top 0.152: U10.19 95.58,26.24 95.76,26.42 96.57,26.42 96.88,26.72 97.38,26.72 v98.04,27.38
  Bottom 0.152: v98.04,27.38 97.38,26.72 96.88,26.72 96.57,26.42 95.76,26.42 95.58,26.24 U10.19
FAULT3  (via drill 0.33)
  Top 0.152: U14.19 126.57,26.24 126.75,26.42 127.56,26.42 127.86,26.72 128.37,26.72 v129.03,27.38
  Bottom 0.152: v129.03,27.38 128.37,26.72 127.86,26.72 127.56,26.42 126.75,26.42 126.57,26.24 U14.19
FAULT4  (via drill 0.33)
  Top 0.152: U18.19 33.6,71.2 33.78,71.37 34.59,71.37 34.9,71.68 35.41,71.68 v36.07,72.34
  Bottom 0.152: v36.07,72.34 35.41,71.68 34.9,71.68 34.59,71.37 33.78,71.37 33.6,71.2 U18.19
FAULT5  (via drill 0.33)
  Top 0.152: U22.19 64.59,71.2 64.77,71.37 65.58,71.37 65.89,71.68 66.4,71.68 v67.06,72.34
  Bottom 0.152: v67.06,72.34 66.4,71.68 65.89,71.68 65.58,71.37 64.77,71.37 64.59,71.2 U22.19
FAULT6  (via drill 0.33)
  Top 0.152: U26.19 95.58,71.2 95.76,71.37 96.57,71.37 96.88,71.68 97.38,71.68 v98.04,72.34
  Bottom 0.152: v98.04,72.34 97.38,71.68 96.88,71.68 96.57,71.37 95.76,71.37 95.58,71.2 U26.19
FAULT7  (via drill 0.33)
  Top 0.152: U30.19 126.57,71.2 126.75,71.37 127.56,71.37 127.86,71.68 128.37,71.68 v129.03,72.34
  Bottom 0.152: v129.03,72.34 128.37,71.68 127.86,71.68 127.56,71.37 126.75,71.37 126.57,71.2 U30.19
FW_RCVR  (via drill 0.33)
  Top 0.152: v33.35,15.16 33.76,15.57 33.76,16.1 33.62,16.24 U3.69
  Bottom 0.152: U3.69 33.62,16.24 33.76,16.1 33.76,15.57 v33.35,15.16
FW_RCVR1  (via drill 0.33)
  Top 0.152: v64.34,15.16 64.75,15.57 64.75,16.1 64.61,16.24 U6.69
  Bottom 0.152: U6.69 64.61,16.24 64.75,16.1 64.75,15.57 v64.34,15.16
FW_RCVR2  (via drill 0.33)
  Top 0.152: v95.33,15.16 95.73,15.57 95.73,16.1 95.6,16.24 U10.69
  Bottom 0.152: U10.69 95.6,16.24 95.73,16.1 95.73,15.57 v95.33,15.16
FW_RCVR3  (via drill 0.33)
  Top 0.152: v126.31,15.16 126.72,15.57 126.72,16.1 126.59,16.24 U14.69
  Bottom 0.152: U14.69 126.59,16.24 126.72,16.1 126.72,15.57 v126.31,15.16
FW_RCVR4  (via drill 0.33)
  Top 0.152: v33.35,60.12 33.76,60.53 33.76,61.06 33.62,61.2 U18.69
  Bottom 0.152: U18.69 33.62,61.2 33.76,61.06 33.76,60.53 v33.35,60.12
FW_RCVR5  (via drill 0.33)
  Top 0.152: v64.34,60.12 64.75,60.53 64.75,61.06 64.61,61.2 U22.69
  Bottom 0.152: U22.69 64.61,61.2 64.75,61.06 64.75,60.53 v64.34,60.12
FW_RCVR6  (via drill 0.33)
  Top 0.152: v95.33,60.12 95.73,60.53 95.73,61.06 95.6,61.2 U26.69
  Bottom 0.152: U26.69 95.6,61.2 95.73,61.06 95.73,60.53 v95.33,60.12
FW_RCVR7  (via drill 0.33)
  Top 0.152: v126.31,60.12 126.72,60.53 126.72,61.06 126.59,61.2 U30.69
  Bottom 0.152: U30.69 126.59,61.2 126.72,61.06 126.72,60.53 v126.31,60.12
GND  (via drill 0.33, 0.51)
  Top 0.152: U3.1 33.66,29.84 | U3.13 33.93,27.44 v33.98,27.38 33.64,27.04 U3.15 | U3.5 32.09,29.04 32,28.96 32,28.24 | U3.11 32,27.84 32,28.24 | U3.9 32,28.24
  Bottom 0.152: U3.5 33.66,29.04 33.66,29.08 | U3.11 33.53,27.84 v33.98,27.38 | U3.11 33.5,27.84 33.91,27.43 | U3.13 33.93,27.44 v33.98,27.38 | U3.15 33.64,27.04 v33.98,27.38 | U3.9 32,28.24 32,27.84 U3.11
  other vias: 35.1,29.03 21.72,30.61 23.62,30.61 14.1,27.43 33.78,31.24 31.7,30.94 20.45,24.64 24.77,21.21 23.75,18.92 24.77,22.99 20.45,27.56 24.89,43.94 25.02,47.5
  pour Bottom (isolate 0.051, rank 6): 37.34,49.53 37.34,8.64 arc-90 35.56,6.86 8.64,6.86 arc-90 6.86,8.64 6.86,49.53 arc-90 8.64,51.31 35.56,51.31 arc-90
  pour Top (isolate 0.051, rank 6): 37.34,8.59 arc-90 35.61,6.86 8.64,6.86 arc-90 6.86,8.64 6.86,49.53 arc-90 8.64,51.31 35.56,51.31 arc-90 37.34,49.53
GND1  (via drill 0.33, 0.51)
  Top 0.152: U6.1 64.64,29.84 | U6.13 64.92,27.44 v64.97,27.38 64.63,27.04 U6.15 | U6.5 63.07,29.04 62.99,28.96 62.99,28.24 | U6.11 62.99,27.84 62.99,28.24 | U6.9 62.99,28.24
  Bottom 0.152: U6.5 64.64,29.04 64.64,29.08 | U6.11 64.52,27.84 v64.97,27.38 | U6.11 64.49,27.84 64.9,27.43 | U6.13 64.92,27.44 v64.97,27.38 | U6.15 64.63,27.04 v64.97,27.38 | U6.9 62.99,28.24 62.99,27.84 U6.11
  other vias: 66.09,29.03 52.7,30.61 54.61,30.61 45.09,27.43 64.77,31.24 62.69,30.94 51.44,24.64 55.75,21.21 54.74,18.92 55.75,22.99 51.44,27.56 55.88,43.94 56.01,47.5
  pour Bottom (isolate 0.051, rank 6): 68.33,49.53 68.33,8.64 arc-90 66.55,6.86 39.62,6.86 arc-90 37.85,8.64 37.85,49.53 arc-90 39.62,51.31 66.55,51.31 arc-90
  pour Top (isolate 0.051, rank 6): 68.33,8.59 arc-90 66.6,6.86 39.62,6.86 arc-90 37.85,8.64 37.85,49.53 arc-90 39.62,51.31 66.55,51.31 arc-90 68.33,49.53
GND2  (via drill 0.33, 0.51)
  Top 0.152: U10.1 95.63,29.84 | U10.13 95.91,27.44 v95.96,27.38 95.62,27.04 U10.15 | U10.5 94.06,29.04 93.98,28.96 93.98,28.24 | U10.11 93.98,27.84 93.98,28.24 | U10.9 93.98,28.24
  Bottom 0.152: U10.5 95.63,29.04 95.63,29.08 | U10.11 95.5,27.84 v95.96,27.38 | U10.11 95.48,27.84 95.89,27.43 | U10.13 95.9,27.44 v95.96,27.38 | U10.15 95.62,27.04 v95.96,27.38 | U10.9 93.98,28.24 93.98,27.84 U10.11
  other vias: 97.08,29.03 83.69,30.61 85.6,30.61 76.07,27.43 95.76,31.24 93.68,30.94 82.42,24.64 86.74,21.21 85.72,18.92 86.74,22.99 82.42,27.56 86.87,43.94 87,47.5
  pour Bottom (isolate 0.051, rank 6): 99.31,49.53 99.31,8.64 arc-90 97.54,6.86 70.61,6.86 arc-90 68.83,8.64 68.83,49.53 arc-90 70.61,51.31 97.54,51.31 arc-90
  pour Top (isolate 0.051, rank 6): 99.31,8.59 arc-90 97.59,6.86 70.61,6.86 arc-90 68.83,8.64 68.83,49.53 arc-90 70.61,51.31 97.54,51.31 arc-90 99.31,49.53
GND3  (via drill 0.33, 0.51)
  Top 0.152: U14.1 126.62,29.84 | U14.13 126.89,27.44 v126.95,27.38 126.61,27.04 U14.15 | U14.5 125.05,29.04 124.97,28.96 124.97,28.24 | U14.11 124.97,27.84 124.97,28.24 | U14.9 124.97,28.24
  Bottom 0.152: U14.5 126.62,29.04 126.62,29.08 | U14.11 126.49,27.84 v126.95,27.38 | U14.11 126.47,27.84 126.87,27.43 | U14.13 126.89,27.44 v126.95,27.38 | U14.15 126.61,27.04 v126.95,27.38 | U14.9 124.97,28.24 124.97,27.84 U14.11
  other vias: 128.07,29.03 114.68,30.61 116.59,30.61 107.06,27.43 126.75,31.24 124.66,30.94 113.41,24.64 117.73,21.21 116.71,18.92 117.73,22.99 113.41,27.56 117.86,43.94 117.98,47.5
  pour Bottom (isolate 0.051, rank 6): 130.3,49.53 130.3,8.64 arc-90 128.52,6.86 101.6,6.86 arc-90 99.82,8.64 99.82,49.53 arc-90 101.6,51.31 128.52,51.31 arc-90
  pour Top (isolate 0.051, rank 6): 130.3,8.59 arc-90 128.57,6.86 101.6,6.86 arc-90 99.82,8.64 99.82,49.53 arc-90 101.6,51.31 128.52,51.31 arc-90 130.3,49.53
GND4  (via drill 0.33, 0.51)
  Top 0.152: U18.1 33.66,74.8 | U18.13 33.93,72.4 v33.98,72.34 33.64,72 U18.15 | U18.5 32.09,74 32,73.91 32,73.2 | U18.11 32,72.8 32,73.2 | U18.9 32,73.2
  Bottom 0.152: U18.5 33.66,74 33.66,74.04 | U18.11 33.53,72.8 v33.98,72.34 | U18.11 33.5,72.8 33.91,72.39 | U18.13 33.93,72.4 v33.98,72.34 | U18.15 33.64,72 v33.98,72.34 | U18.9 32,73.2 32,72.8 U18.11
  other vias: 35.1,73.99 21.72,75.56 23.62,75.56 14.1,72.39 33.78,76.2 31.7,75.9 20.45,69.6 24.77,66.17 23.75,63.88 24.77,67.94 20.45,72.52 24.89,88.9 25.02,92.46
  pour Bottom (isolate 0.051, rank 6): 37.34,94.49 37.34,53.59 arc-90 35.56,51.82 8.64,51.82 arc-90 6.86,53.59 6.86,94.49 arc-90 8.64,96.27 35.56,96.27 arc-90
  pour Top (isolate 0.051, rank 6): 37.34,53.54 arc-90 35.61,51.82 8.64,51.82 arc-90 6.86,53.59 6.86,94.49 arc-90 8.64,96.27 35.56,96.27 arc-90 37.34,94.49
GND5  (via drill 0.33, 0.51)
  Top 0.152: U22.1 64.64,74.8 | U22.13 64.92,72.4 v64.97,72.34 64.63,72 U22.15 | U22.5 63.07,74 62.99,73.91 62.99,73.2 | U22.11 62.99,72.8 62.99,73.2 | U22.9 62.99,73.2
  Bottom 0.152: U22.5 64.64,74 64.64,74.04 | U22.11 64.52,72.8 v64.97,72.34 | U22.11 64.49,72.8 64.9,72.39 | U22.13 64.92,72.4 v64.97,72.34 | U22.15 64.63,72 v64.97,72.34 | U22.9 62.99,73.2 62.99,72.8 U22.11
  other vias: 66.09,73.99 52.7,75.56 54.61,75.56 45.09,72.39 64.77,76.2 62.69,75.9 51.44,69.6 55.75,66.17 54.74,63.88 55.75,67.94 51.44,72.52 55.88,88.9 56.01,92.46
  pour Bottom (isolate 0.051, rank 6): 68.33,94.49 68.33,53.59 arc-90 66.55,51.82 39.62,51.82 arc-90 37.85,53.59 37.85,94.49 arc-90 39.62,96.27 66.55,96.27 arc-90
  pour Top (isolate 0.051, rank 6): 68.33,53.54 arc-90 66.6,51.82 39.62,51.82 arc-90 37.85,53.59 37.85,94.49 arc-90 39.62,96.27 66.55,96.27 arc-90 68.33,94.49
GND6  (via drill 0.33, 0.51)
  Top 0.152: U26.1 95.63,74.8 | U26.13 95.91,72.4 v95.96,72.34 95.62,72 U26.15 | U26.5 94.06,74 93.98,73.91 93.98,73.2 | U26.11 93.98,72.8 93.98,73.2 | U26.9 93.98,73.2
  Bottom 0.152: U26.5 95.63,74 95.63,74.04 | U26.11 95.5,72.8 v95.96,72.34 | U26.11 95.48,72.8 95.89,72.39 | U26.13 95.9,72.4 v95.96,72.34 | U26.15 95.62,72 v95.96,72.34 | U26.9 93.98,73.2 93.98,72.8 U26.11
  other vias: 97.08,73.99 83.69,75.56 85.6,75.56 76.07,72.39 95.76,76.2 93.68,75.9 82.42,69.6 86.74,66.17 85.72,63.88 86.74,67.94 82.42,72.52 86.87,88.9 87,92.46
  pour Bottom (isolate 0.051, rank 6): 99.31,94.49 99.31,53.59 arc-90 97.54,51.82 70.61,51.82 arc-90 68.83,53.59 68.83,94.49 arc-90 70.61,96.27 97.54,96.27 arc-90
  pour Top (isolate 0.051, rank 6): 99.31,53.54 arc-90 97.59,51.82 70.61,51.82 arc-90 68.83,53.59 68.83,94.49 arc-90 70.61,96.27 97.54,96.27 arc-90 99.31,94.49
GND7  (via drill 0.33, 0.51)
  Top 0.152: U30.1 126.62,74.8 | U30.13 126.89,72.4 v126.95,72.34 126.61,72 U30.15 | U30.5 125.05,74 124.97,73.91 124.97,73.2 | U30.11 124.97,72.8 124.97,73.2 | U30.9 124.97,73.2
  Bottom 0.152: U30.5 126.62,74 126.62,74.04 | U30.11 126.49,72.8 v126.95,72.34 | U30.11 126.47,72.8 126.87,72.39 | U30.13 126.89,72.4 v126.95,72.34 | U30.15 126.61,72 v126.95,72.34 | U30.9 124.97,73.2 124.97,72.8 U30.11
  other vias: 128.07,73.99 114.68,75.56 116.59,75.56 107.06,72.39 126.75,76.2 124.66,75.9 113.41,69.6 117.73,66.17 116.71,63.88 117.73,67.94 113.41,72.52 117.86,88.9 117.98,92.46
  pour Bottom (isolate 0.051, rank 6): 130.3,94.49 130.3,53.59 arc-90 128.52,51.82 101.6,51.82 arc-90 99.82,53.59 99.82,94.49 arc-90 101.6,96.27 128.52,96.27 arc-90
  pour Top (isolate 0.051, rank 6): 130.3,53.54 arc-90 128.57,51.82 101.6,51.82 arc-90 99.82,53.59 99.82,94.49 arc-90 101.6,96.27 128.52,96.27 arc-90 130.3,94.49
GP1  (via drill 0.33)
  Top 0.152: v59.11,20.62 59.12,20.64 U6.48
  Bottom 0.152: U6.48 59.12,20.64 v59.11,20.62
GP2  (via drill 0.33)
  Top 0.152: U6.42 60.2,21.84 v60.02,22.02
  Bottom 0.152: v60.02,22.02 60.2,21.84 U6.42
GP3  (via drill 0.33)
  Top 0.152: U6.34 60.06,23.44 59.54,22.91 58.98,22.91 58.4,23.5 57.78,23.5 v57.51,23.77
  Bottom 0.152: v57.51,23.77 57.78,23.5 58.4,23.5 58.98,22.91 59.54,22.91 60.06,23.44 U6.34
GP4  (via drill 0.33)
  Top 0.152: v59.26,23.57 59.52,23.84 U6.32
  Bottom 0.152: U6.32 59.52,23.84 v59.26,23.57
GP5  (via drill 0.33)
  Top 0.152: U6.30 60.28,24.24 60.27,24.23 58.52,24.23 v58.45,24.16
  Bottom 0.152: v58.45,24.16 58.52,24.23 60.27,24.23 60.28,24.24 U6.30
GP6  (via drill 0.33)
  Top 0.152: U6.28 60.25,24.64 60.15,24.54 59,24.54 58.7,24.84 57.71,24.84 v57.66,24.79
  Bottom 0.152: v57.66,24.79 57.71,24.84 58.7,24.84 59,24.54 60.15,24.54 60.25,24.64 U6.28
GP7  (via drill 0.33)
  Top 0.152: v57.58,25.81 58.24,25.15 58.83,25.15 59.13,24.84 60.02,24.84 60.22,25.04 U6.26
  Bottom 0.152: U6.26 60.22,25.04 60.02,24.84 59.13,24.84 58.83,25.15 58.24,25.15 v57.58,25.81
GP8  (via drill 0.33)
  Top 0.152: v65.33,25.15 65.22,25.04 U6.25
  Bottom 0.152: U6.25 65.22,25.04 v65.33,25.15
GP9  (via drill 0.33)
  Top 0.152: U6.24 60.19,25.44 59.89,25.15 59.26,25.15 v58.6,25.81
  Bottom 0.152: v58.6,25.81 59.26,25.15 59.89,25.15 60.19,25.44 U6.24
GP10  (via drill 0.33)
  Top 0.152: v90.09,20.62 90.11,20.64 U10.48
  Bottom 0.152: U10.48 90.11,20.64 v90.09,20.62
GP11  (via drill 0.33)
  Top 0.152: U10.42 91.19,21.84 v91.01,22.02
  Bottom 0.152: v91.01,22.02 91.19,21.84 U10.42
GP12  (via drill 0.33)
  Top 0.152: U10.34 91.05,23.44 90.53,22.91 89.97,22.91 89.38,23.5 88.77,23.5 v88.49,23.77
  Bottom 0.152: v88.49,23.77 88.77,23.5 89.38,23.5 89.97,22.91 90.53,22.91 91.05,23.44 U10.34
GP12_PWM0  (via drill 0.33)
  Top 0.152: U3.35 33.5,23.04 33.68,23.22 v34.19,23.22
  Bottom 0.152: v34.19,23.22 33.68,23.22 33.5,23.04 U3.35 | U3.35
GP12_PWM1  (via drill 0.33)
  Top 0.152: U6.35 64.49,23.04 64.67,23.22 v65.18,23.22
  Bottom 0.152: v65.18,23.22 64.67,23.22 64.49,23.04 U6.35 | U6.35
GP12_PWM2  (via drill 0.33)
  Top 0.152: U10.35 95.48,23.04 95.66,23.22 v96.16,23.22
  Bottom 0.152: v96.16,23.22 95.66,23.22 95.48,23.04 U10.35 | U10.35
GP12_PWM3  (via drill 0.33)
  Top 0.152: U14.35 126.47,23.04 126.64,23.22 v127.15,23.22
  Bottom 0.152: v127.15,23.22 126.64,23.22 126.47,23.04 U14.35 | U14.35
GP12_PWM4  (via drill 0.33)
  Top 0.152: U18.35 33.5,68 33.68,68.17 v34.19,68.17
  Bottom 0.152: v34.19,68.17 33.68,68.17 33.5,68 U18.35 | U18.35
GP12_PWM5  (via drill 0.33)
  Top 0.152: U22.35 64.49,68 64.67,68.17 v65.18,68.17
  Bottom 0.152: v65.18,68.17 64.67,68.17 64.49,68 U22.35 | U22.35
GP12_PWM6  (via drill 0.33)
  Top 0.152: U26.35 95.48,68 95.66,68.17 v96.16,68.17
  Bottom 0.152: v96.16,68.17 95.66,68.17 95.48,68 U26.35 | U26.35
GP12_PWM7  (via drill 0.33)
  Top 0.152: U30.35 126.47,68 126.64,68.17 v127.15,68.17
  Bottom 0.152: v127.15,68.17 126.64,68.17 126.47,68 U30.35 | U30.35
GP13  (via drill 0.33)
  Top 0.152: v90.25,23.57 90.51,23.84 U10.32
  Bottom 0.152: U10.32 90.51,23.84 v90.25,23.57
GP13_PWM1  (via drill 0.33)
  Top 0.152: v36.5,24.43 36.47,24.43 35.79,23.75 35.26,23.75 35.13,23.88 33.91,23.88 33.47,23.44 U3.33
  Bottom 0.152: U3.33 33.47,23.44 33.91,23.88 35.13,23.88 35.26,23.75 35.79,23.75 36.47,24.43 v36.5,24.43
GP13_PWM2  (via drill 0.33)
  Top 0.152: v67.49,24.43 67.46,24.43 66.78,23.75 66.24,23.75 66.12,23.88 64.9,23.88 64.46,23.44 U6.33
  Bottom 0.152: U6.33 64.46,23.44 64.9,23.88 66.12,23.88 66.24,23.75 66.78,23.75 67.46,24.43 v67.49,24.43
GP13_PWM3  (via drill 0.33)
  Top 0.152: v98.48,24.43 98.45,24.43 97.77,23.75 97.23,23.75 97.1,23.88 95.89,23.88 95.45,23.44 U10.33
  Bottom 0.152: U10.33 95.45,23.44 95.89,23.88 97.1,23.88 97.23,23.75 97.77,23.75 98.45,24.43 v98.48,24.43
GP13_PWM4  (via drill 0.33)
  Top 0.152: v129.46,24.43 129.44,24.43 128.75,23.75 128.22,23.75 128.09,23.88 126.87,23.88 126.44,23.44 U14.33
  Bottom 0.152: U14.33 126.44,23.44 126.87,23.88 128.09,23.88 128.22,23.75 128.75,23.75 129.44,24.43 v129.46,24.43
GP13_PWM5  (via drill 0.33)
  Top 0.152: v36.5,69.39 36.47,69.39 35.79,68.71 35.26,68.71 35.13,68.83 33.91,68.83 33.47,68.4 U18.33
  Bottom 0.152: U18.33 33.47,68.4 33.91,68.83 35.13,68.83 35.26,68.71 35.79,68.71 36.47,69.39 v36.5,69.39
GP13_PWM6  (via drill 0.33)
  Top 0.152: v67.49,69.39 67.46,69.39 66.78,68.71 66.24,68.71 66.12,68.83 64.9,68.83 64.46,68.4 U22.33
  Bottom 0.152: U22.33 64.46,68.4 64.9,68.83 66.12,68.83 66.24,68.71 66.78,68.71 67.46,69.39 v67.49,69.39
GP13_PWM7  (via drill 0.33)